# Altium PCB wulpus_pro_shield.PcbDoc (part 1 of 3)
Units mm, origin at the board's own origin, x right, y up, seen from the top; angles counter-clockwise.
Board outline 44.9 x 21 mm, 6 copper layers (Top Layer, Layer 2, Layer 3, Layer 4, Layer 5, Bottom Layer), stack 0.913 mm thick; 186 components, 134 nets, 731 pads, 283 vias.
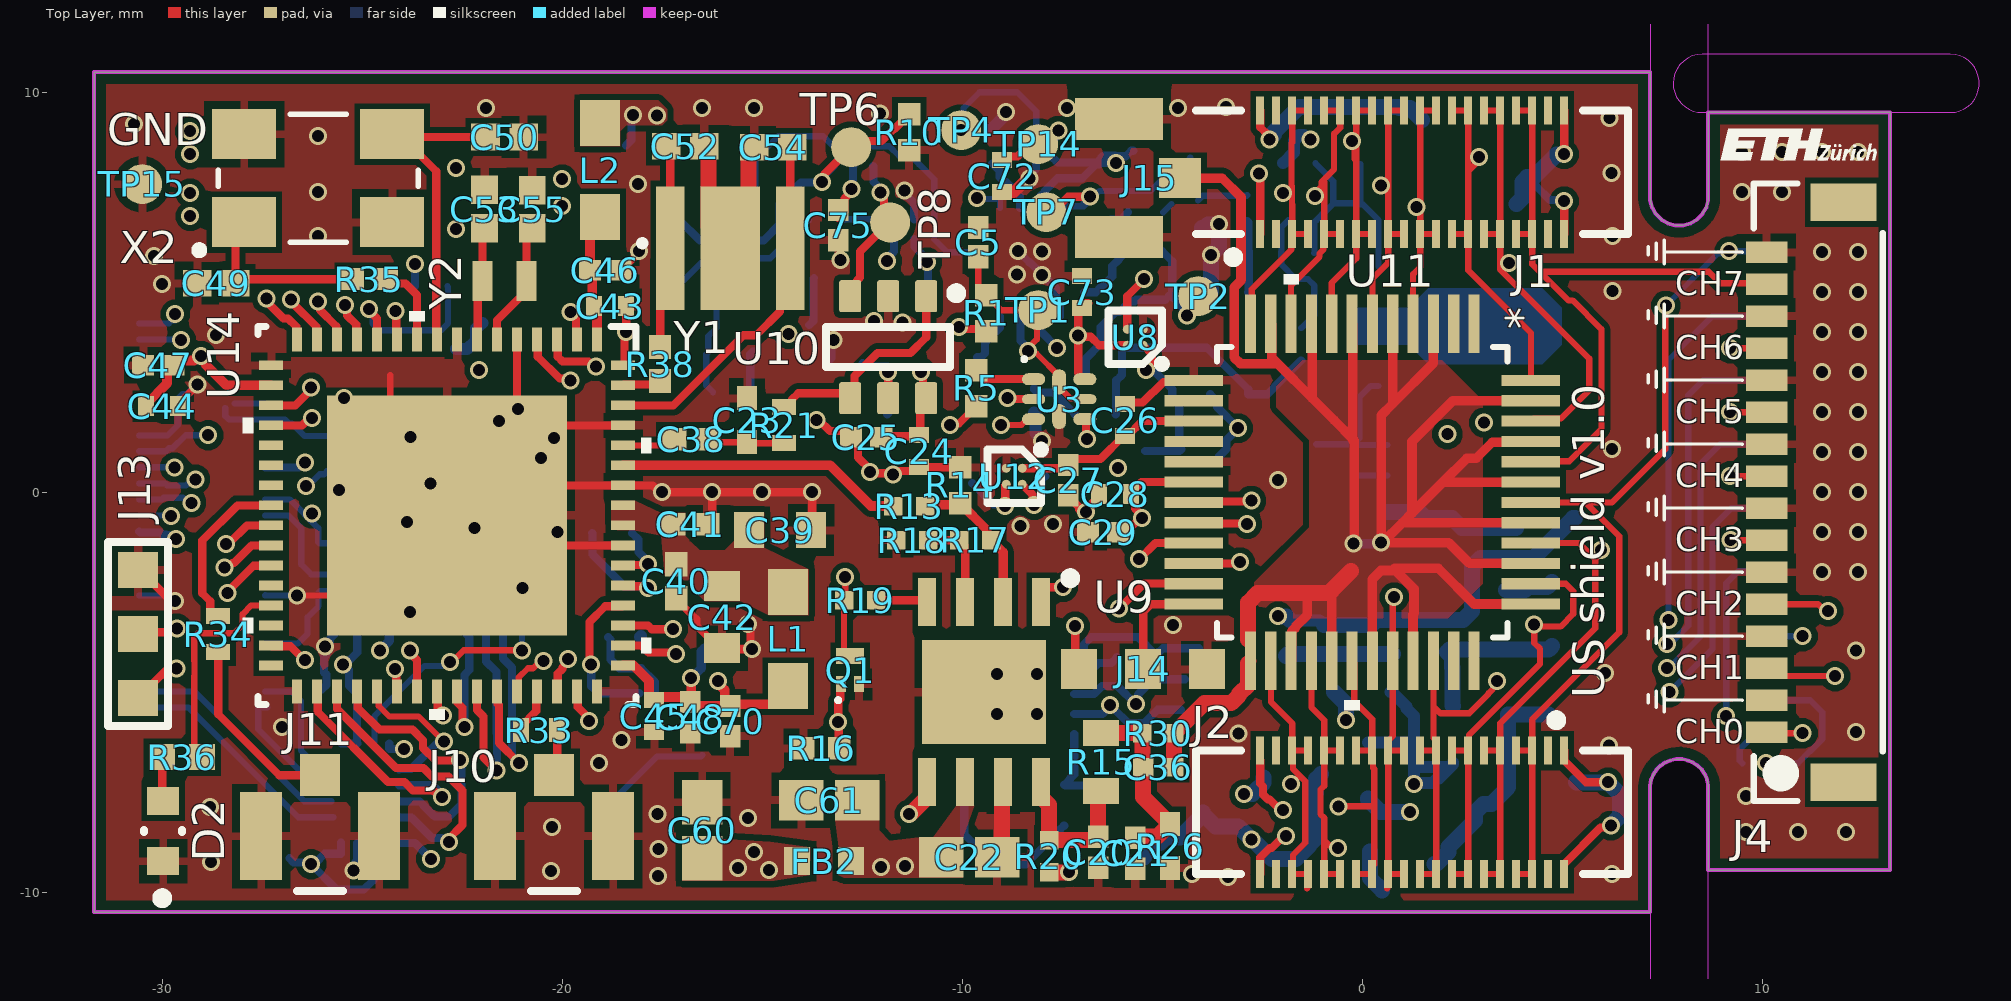
[diagram p0: Top Layer view]
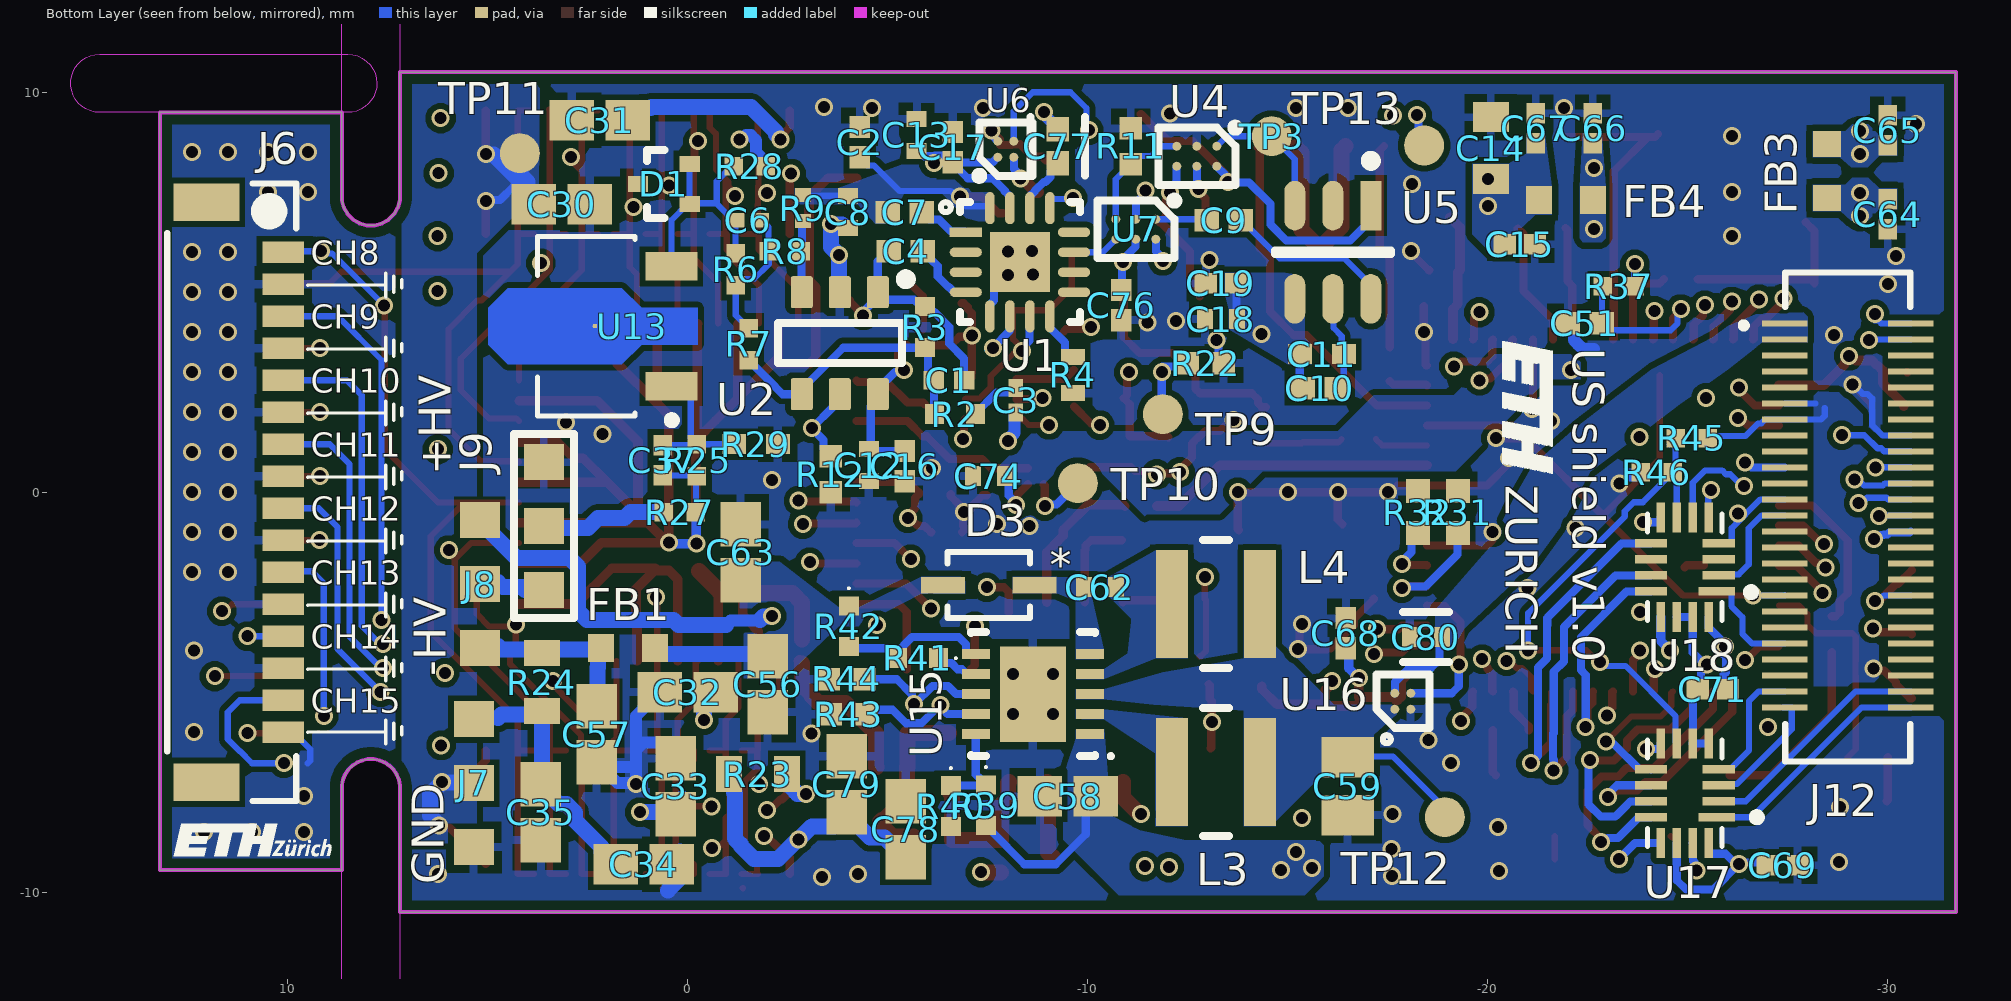
[diagram p1: Bottom Layer view, seen from below]
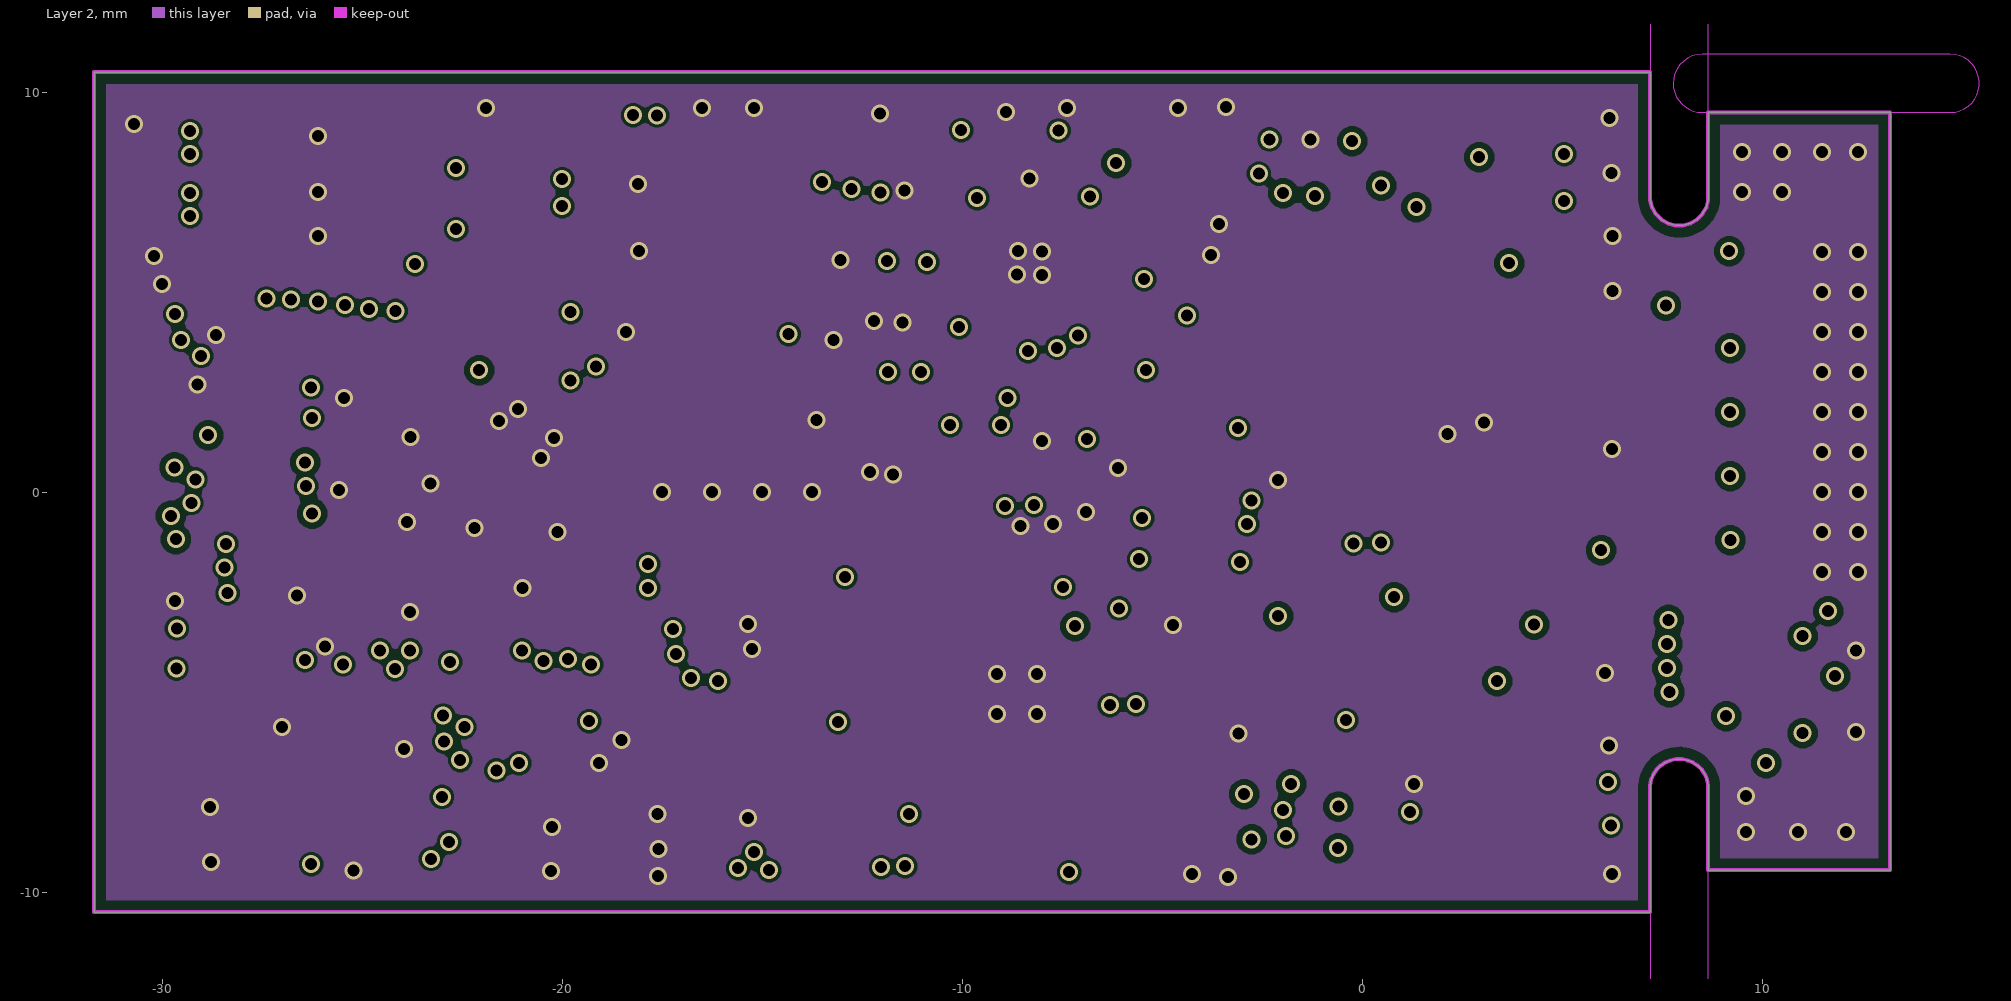
[diagram p2: Layer 2]
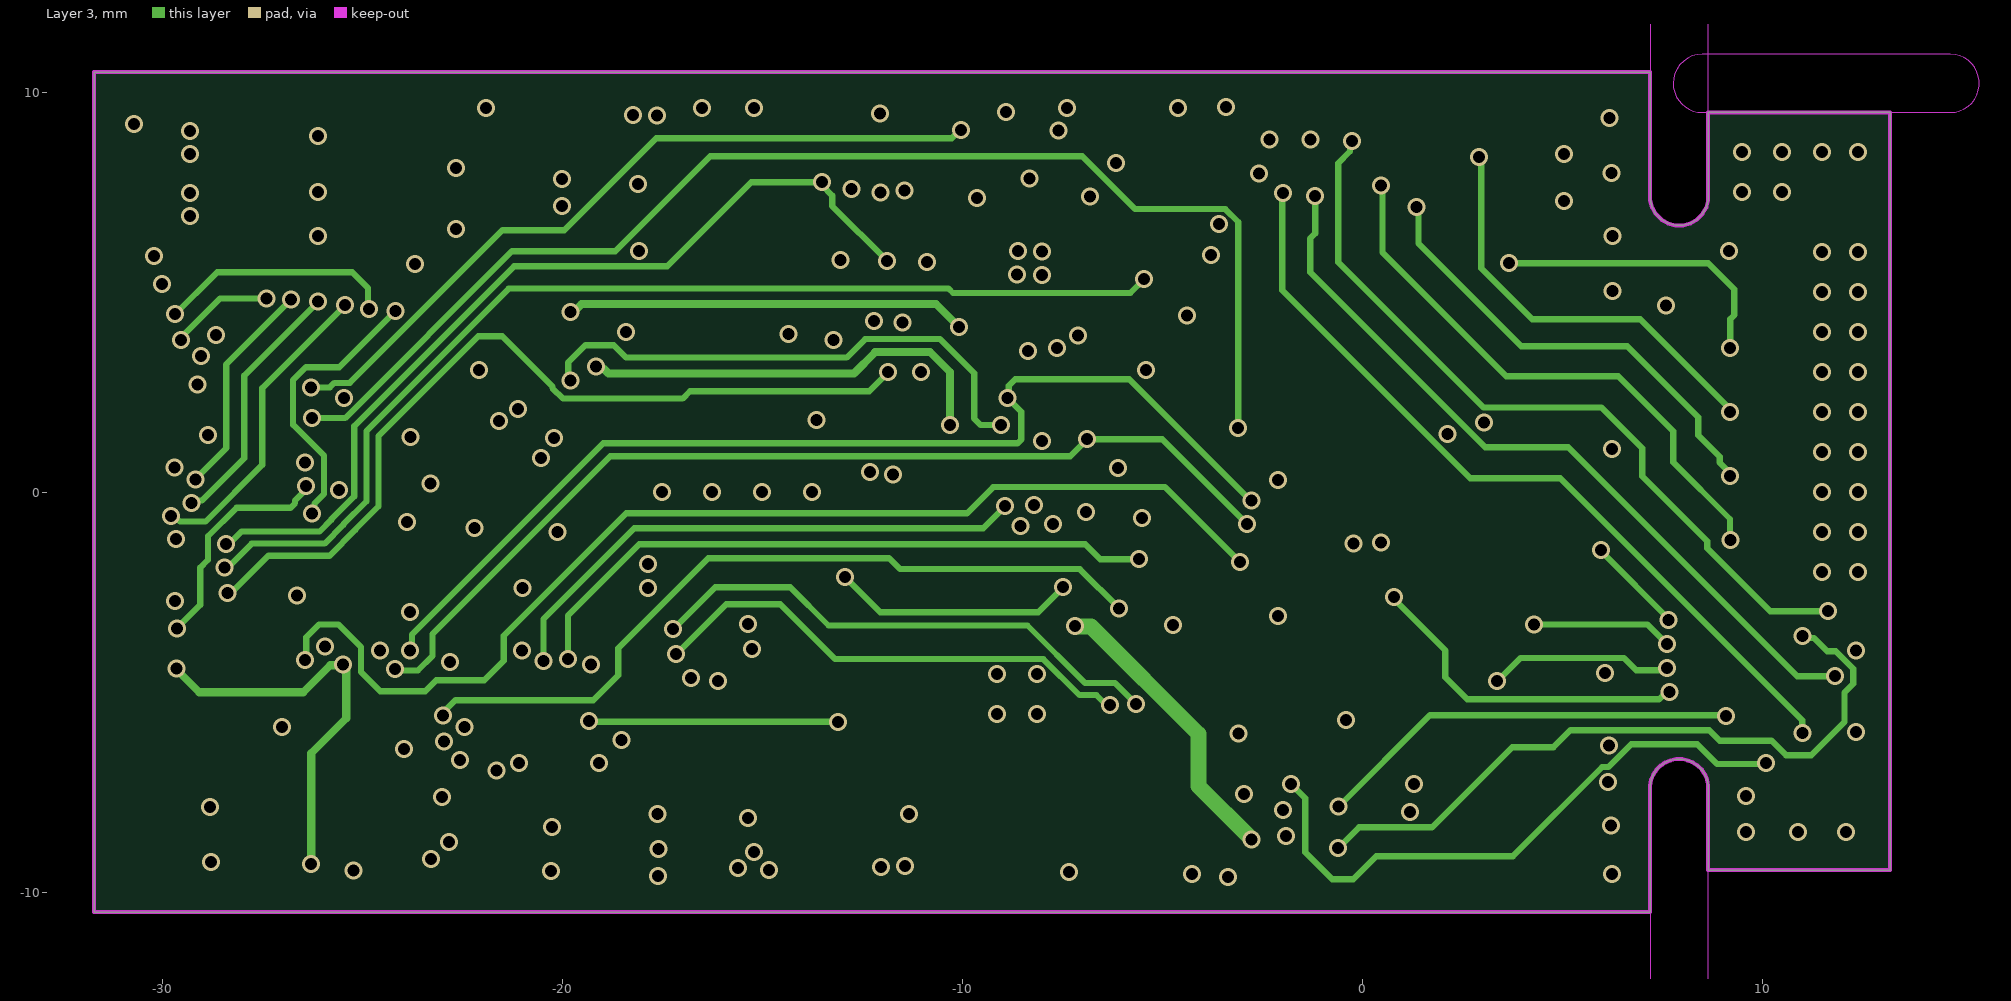
[diagram p3: Layer 3]
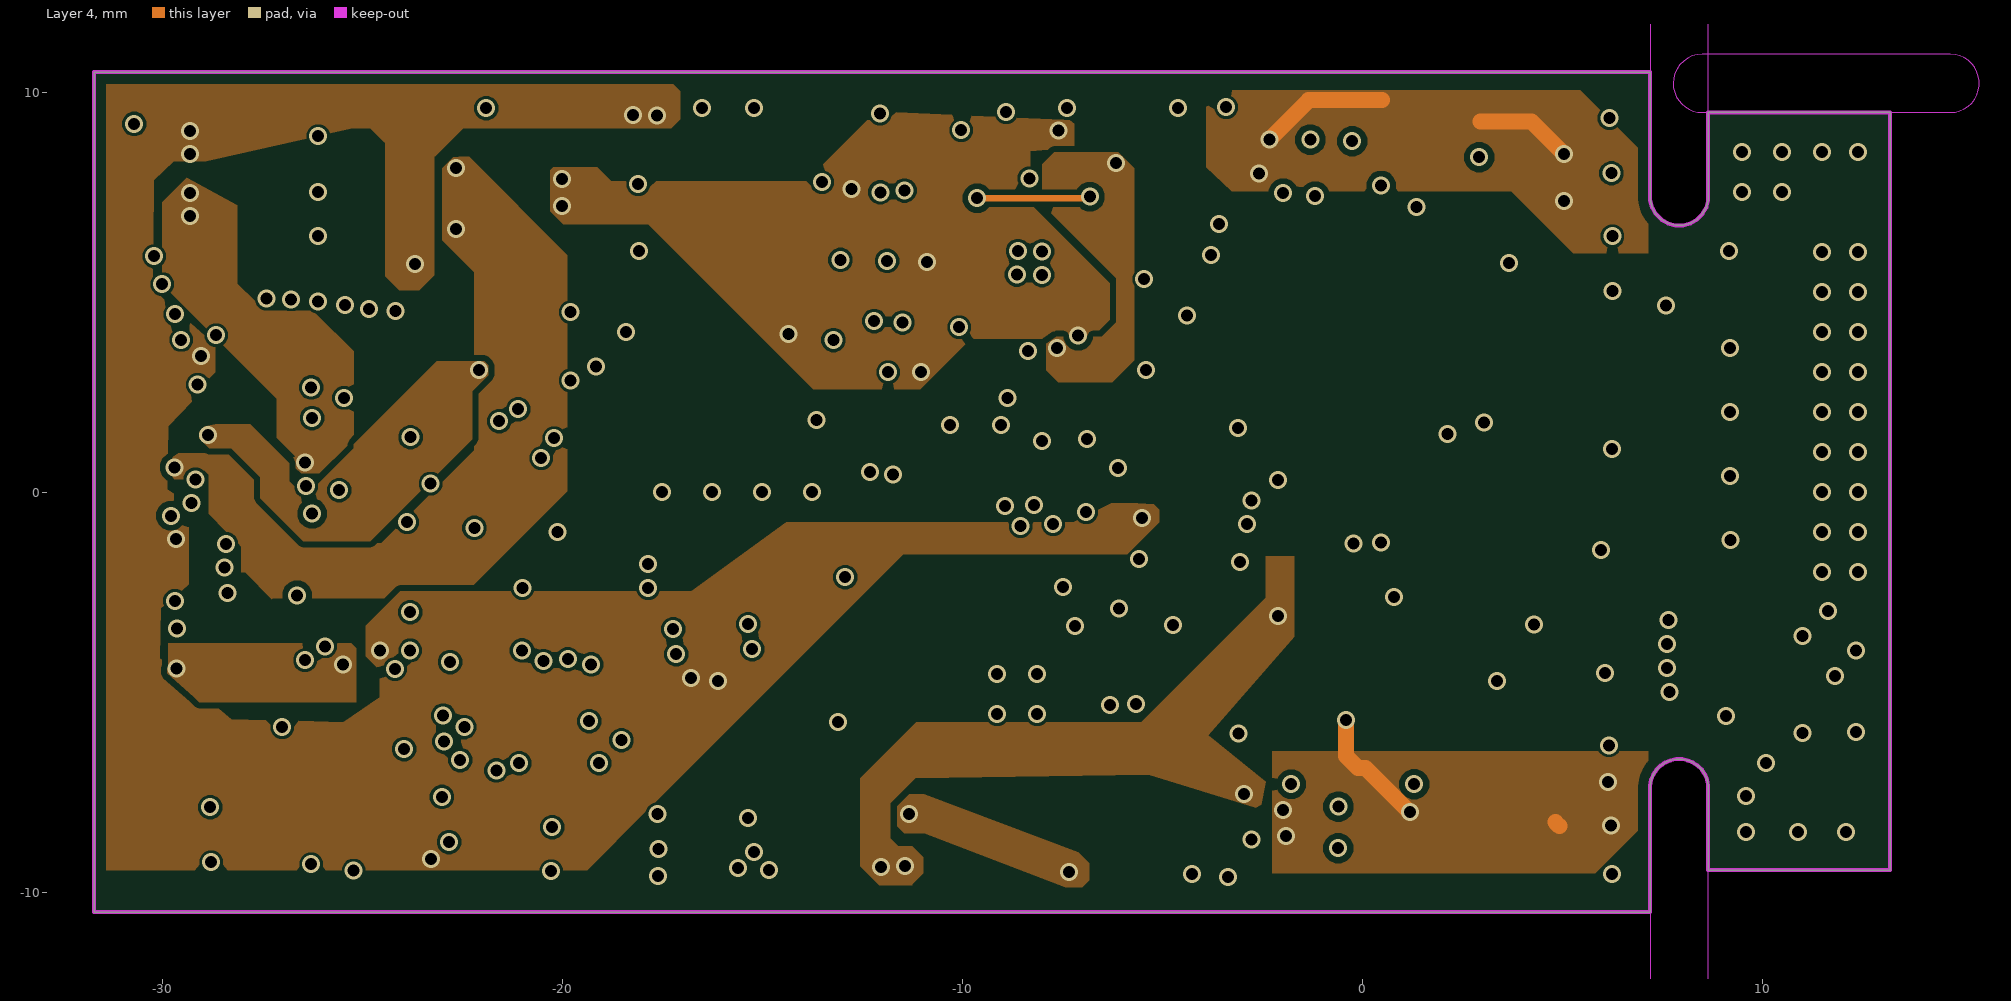
[diagram p4: Layer 4]
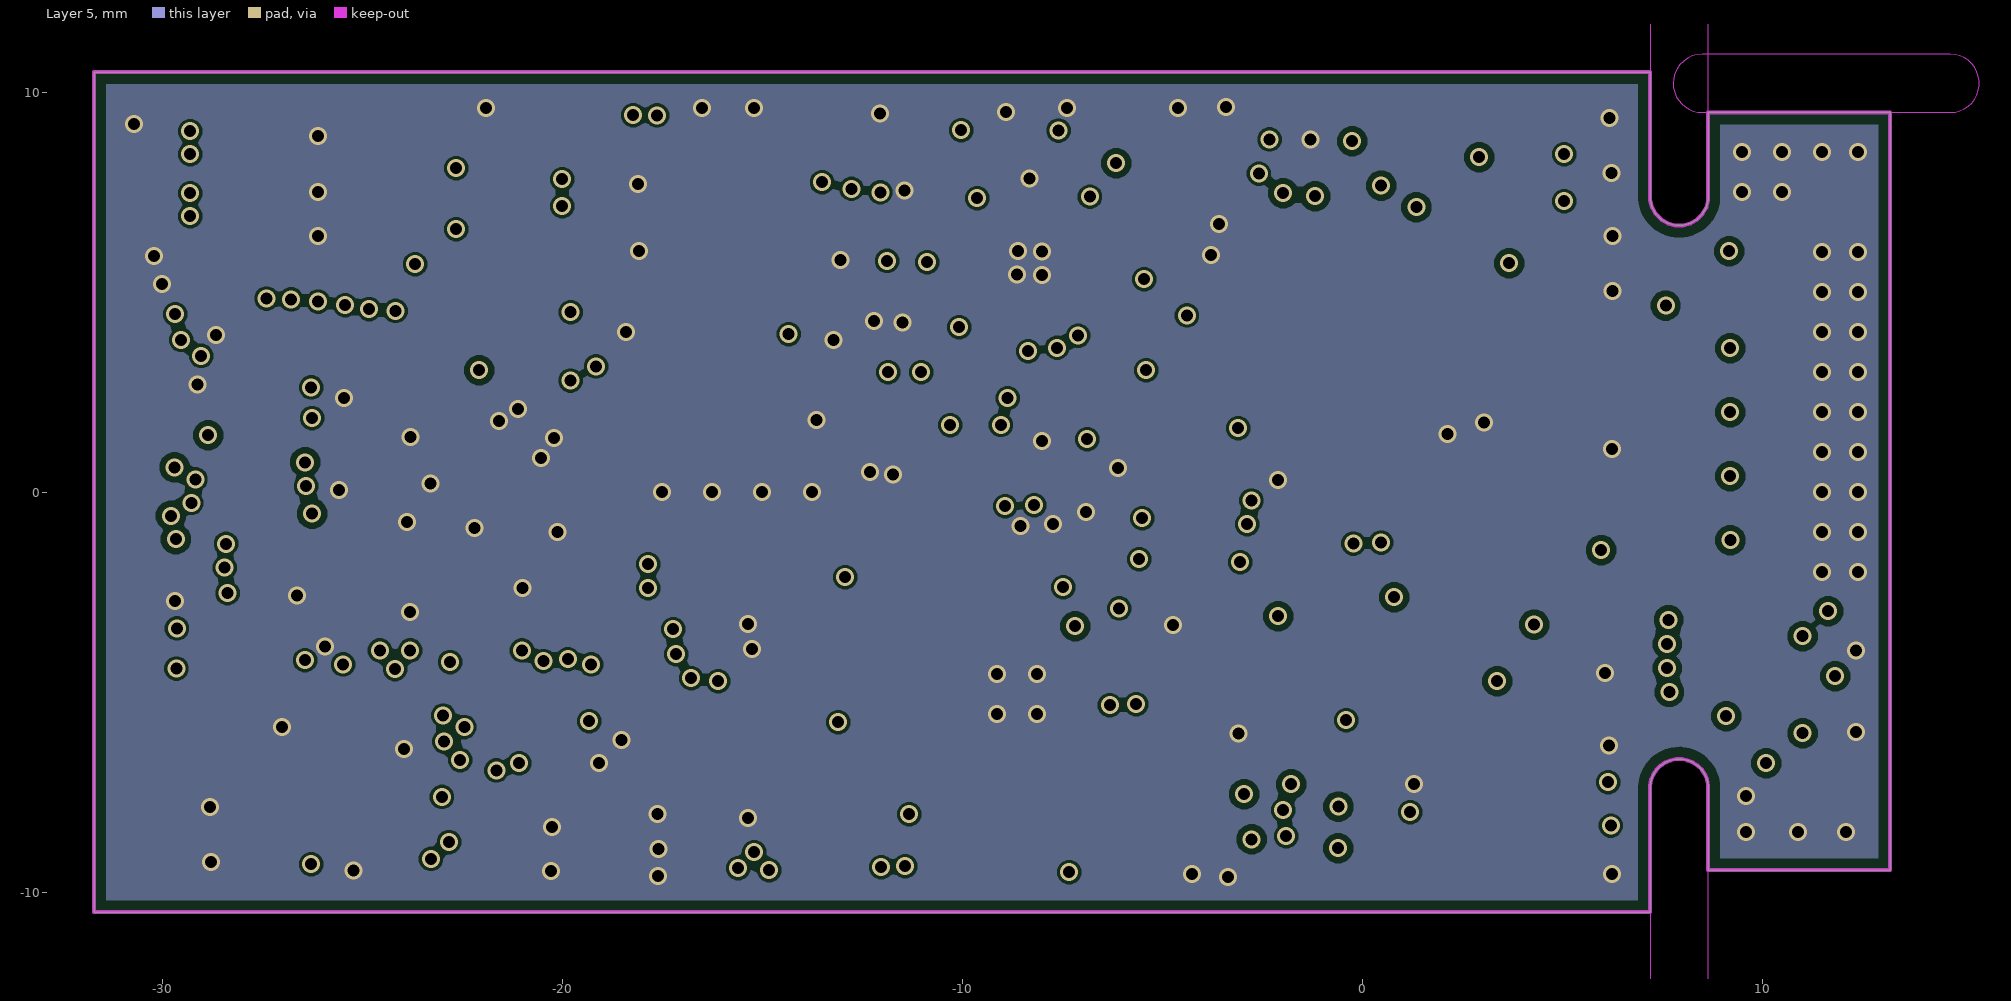
[diagram p5: Layer 5]
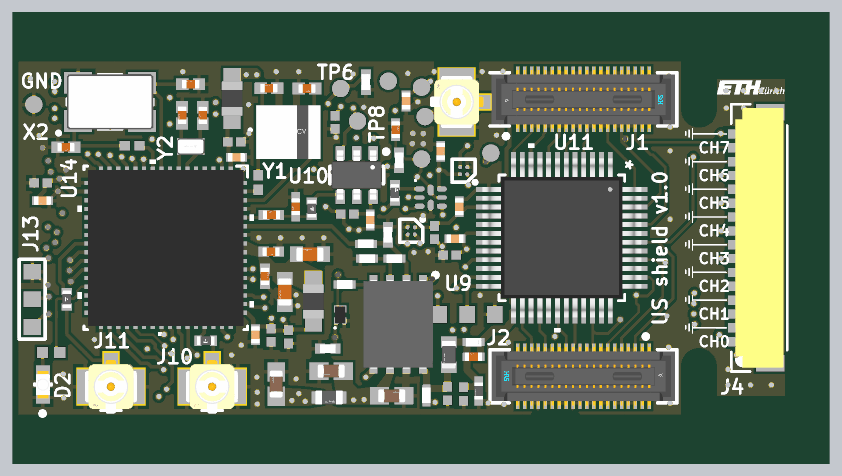
[diagram p8: 3D render of the assembled board from above, using the file's embedded part models]
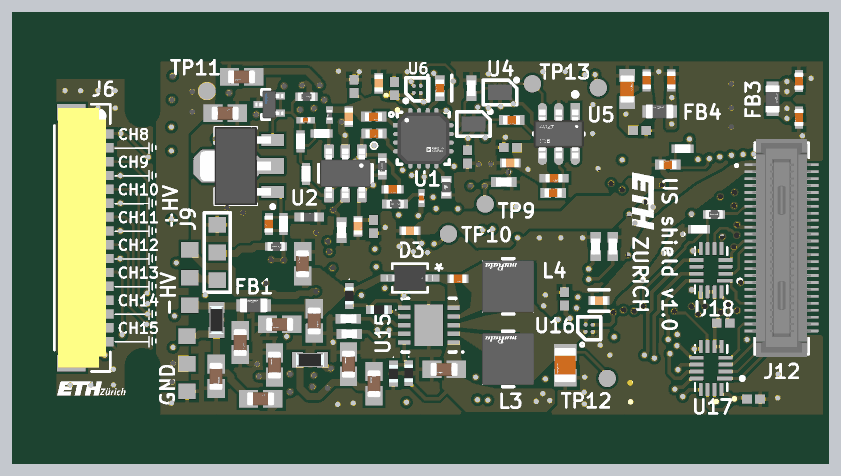
[diagram p9: 3D render of the assembled board from below, using the file's embedded part models]

## Layer stack, top to bottom
Top Solder: solder mask 0.0102, Solder Resist, Dk 3.5
Top Layer: signal copper 0.0175
Dielectric 3: prepreg 0.1195, PP-006, Dk 4.45
Layer 2: signal copper 0.035
Dielectric 5: core 0.13, Core-009, Dk 4.6
Layer 3: signal copper 0.035
Dielectric 1: prepreg 0.1195, PP-006, Dk 4.45
Dielectric 2: prepreg 0.1195, PP-006, Dk 4.45
Layer 4: signal copper 0.035
Dielectric 6: core 0.13, Core-009, Dk 4.6
Layer 5: signal copper 0.035
Dielectric 4: prepreg 0.1195, PP-006, Dk 4.45
Bottom Layer: signal copper 0.0175
Bottom Solder: solder mask 0.0102, Solder Resist, Dk 3.5

## Board outline
-31.7,-10.5 7.195,-10.5 7.195,-7.4 7.195,-7.328 7.223,-7.188 7.278,-7.055 7.358,-6.936 7.459,-6.835 7.578,-6.755 7.71,-6.7 7.851,-6.672 7.923,-6.672 7.924,-6.672 7.995,-6.672 8.135,-6.7 8.268,-6.755 8.387,-6.835 8.488,-6.936 8.567,-7.055 8.622,-7.188 8.65,-7.328 8.65,-7.4 8.65,-9.45 13.2,-9.45 13.2,9.495 8.65,9.495 8.65,7.4 8.65,7.304 8.6,7.119 8.505,6.953 8.369,6.818 8.203,6.722 8.018,6.673 7.827,6.673 7.642,6.722 7.476,6.818 7.341,6.953 7.245,7.119 7.195,7.304 7.195,7.4 7.195,10.5 -31.7,10.5
cut-out: 14.7,10.95 8.5,10.95 ccw(c8.5,10.223) 7.772,10.224 7.772,10.223 ccw(c8.5,10.223) 8.5,9.495 14.7,9.495 ccw(c14.7,10.223)
cut-out: 8.65,7.4 8.65,12.3 ccw(c7.923,12.3) 7.924,13.028 7.923,13.028 ccw(c7.923,12.3) 7.195,12.3 7.195,7.4 ccw(c7.923,7.4)
cut-out: 8.65,-12.3 8.65,-7.4 ccw(c7.923,-7.4) 7.924,-6.672 7.923,-6.672 ccw(c7.923,-7.4) 7.195,-7.4 7.195,-12.3 ccw(c7.923,-12.3)

## Design rules (kind name [scope] priority, off if disabled: settings)
BoardOutlineClearance [Not OnSilkscreen] p1: gap=0.3 ignorepadtopadclearanceinfootprint=FALSE except(0.2: Track-OutlineEdge Track-CavityEdge Track-CutoutEdge SMDPad-OutlineEdge SMDPad-CavityEdge SMDPad-CutoutEdge; 0.5: THPad-OutlineEdge THPad-CavityEdge THPad-CutoutEdge Via-OutlineEdge Via-CavityEdge Via-CutoutEdge)
Clearance [All] p1: gap=0.15 ignorepadtopadclearanceinfootprint=FALSE except(0.2: Arc-THPad Track-THPad)
ComponentClearance [All] p1: gap=0.1 collisioncheckmode=3 verticalgap=0.3 showdistances=TRUE
HoleToHoleClearance [All] p1: gap=0.254 allowstackedmicrovias=FALSE
MinimumSolderMaskSliver [All] p1: minsoldermaskwidth=0.1
PlaneConnect [All] p1: planeconnectstyle=Relief reliefexpansion=0.508 reliefentries=4 reliefconductorwidth=0.254 reliefairgap=0.2
PolygonConnect PolygonConnect_GND_via [InNet('GND') vs IsVia] p1: connectstyle=Direct reliefconductorwidth=0.254 reliefentries=4 polygonreliefangle="90 Angle" airgapwidth=0.254
PolygonConnect PolygonConnect_GND [InNet('GND')] p2: connectstyle=Relief reliefconductorwidth=0.2 reliefentries=4 polygonreliefangle="90 Angle" airgapwidth=0.2
PolygonConnect [All] p3: connectstyle=Direct reliefconductorwidth=0.254 reliefentries=4 polygonreliefangle="90 Angle" airgapwidth=0.254
RoutingVias [All] p1: holewidth=0.3 width=0.45 viastyle="Through Hole" minholewidth=0.3 minwidth=0.45 maxholewidth=0.3 maxwidth=0.45
SilkToSilkClearance [All] p1: silktosilkclearance=0.01
SilkToSolderMaskClearance [IsPad] p1: minsilkscreentomaskgap=0.01 clearancetoexposedcopper=TRUE
SolderMaskExpansion [IsVia] p1: expansion=0.102 istentingtop=TRUE
SolderMaskExpansion SolderMaskExpansion_1 [All] p2: expansion=0.025 istentingtop=FALSE
Width [All] p1: maxlimit=1.016 minlimit=0.152 preferedwidth=0.203
24 further rules are at their usual default settings.

## Classes and differential pairs
component class main: TP15
component class U_tx_path: C20 C21 C22 Q1 R13 R14 R15 R16 R17 R18 R19 R20 U9
component class U_rx_path: C1 C2 C3 C4 C5 C6 C7 C8 C9 C10 C11 C12 C13 C14 C15 C16 C17 C18 C19 C72 C73 C75 C76 C77 R1 R2 R3 R4 R5 R6 R7 R8 R9 R10 R11 R12 TP1 TP2 TP3 TP4 TP6 TP7 U1 U2 U3 U4 U5 U6 U7 U8
component class U_rx_path_lp_filter: C23 C24 C25 R21 R22 TP8 TP9 U10
component class U_power: C56 C57 C58 C59 C60 C61 C62 C63 C64 C65 C66 C67 C80 D3 FB1 FB2 FB3 FB4 L3 L4 R39 R40 R41 R42 R43 R44 TP12 TP13 TP14 U15 U16
component class U_msp430: 23 C38 C39 C40 C41 C42 C43 C44 C45 C46 C47 C48 C49 C50 C51 C52 C53 C54 C55 D2 J10 J11 L1 L2 R31 R32 R33 R34 R35 R36 R37 R38 U14 X2 Y1 Y2
component class U_hv_mux_tr_sw: 323 C26 C27 C28 C29 C30 C31 C32 C33 C34 C35 C36 C37 C74 C78 C79 D1 J1 J2 J4 J6 J7 J8 J9 J14 J15 R23 R24 R25 R26 R27 R28 R29 R30 TP10 TP11 U11 U12 U13
component class U_host_connector: C68 C69 C70 C71 J12 J13 R45 R46 U17 U18

## Components (designator, comment, footprint, x,y, rotation, side; value= is the part's Value field where it differs from the comment)
C1 "GJM1555C1H1R5BB01D" FP-GJM155-0_05-IPC_C -6.529,2.8 r180 bottom
C2 "C0402C104K4RACTU" CAPC1005X55X30LL05T10 -4.3,8.75 r270 bottom
C3 "GRM033R71A103KA01D" FP-GRM033-0_03-IPC_B -8.2,2.3 r90 bottom
C4 "GRM1555C1H102JA01D" FP-GRM155-0_05-IPC_B -5.45,6.025 r180 bottom
C5 "04025C332JAT2A" FP-0402-L_1_0_1-W_0_5_0_1-IPC_C -9.6,6.25 r90 top
C6 "GRM033R71A103KA01D" FP-GRM033-0_03-IPC_B -1.5,6.8 r180 bottom
C7 "GRM1555C1H102JA01D" FP-GRM155-0_05-IPC_B -5.425,7 r180 bottom
C8 "C1005X7S1A225K050BC" FP-C1005-050-0_15-0_1-MFG -4,7 r270 bottom
C9 "GRM1555C1H102JA01D" FP-GRM155-0_05-IPC_B -13.4,6.8 r180 bottom
C10 "GRM1555C1H102JA01D" FP-GRM155-0_05-IPC_B -15.8,2.6 r0 bottom
C11 "04025A101FAT2A" FP-0402-L_1_0_1-W_0_5_0_1-MFG -15.85,3.45 r180 bottom locked
C12 "C1005X7S1A225K050BC" FP-C1005-050-0_15-0_1-MFG -4.525,0.675 r270 bottom
C13 "C1005X7S1A225K050BC" FP-C1005-050-0_15-0_1-MFG -5.724,8.936 r90 bottom
C14 "GRM188R60J476ME01D" FP-GRM188-0_2-MFG -20.075,8.6 r90 bottom locked
C15 "C0402C104K4RACTU" CAPC1005X55X30LL05T10 -20.8,6.2 r0 bottom locked
C16 "C0402C104K4RACTU" CAPC1005X55X30LL05T10 -5.425,0.65 r90 bottom
C17 "C0402C104K4RACTU" CAPC1005X55X30LL05T10 -6.625,8.625 r270 bottom
C18 "C1005X7S1A225K050BC" FP-C1005-050-0_15-0_1-MFG -13.325,4.325 r0 bottom locked
C19 "C0402C104K4RACTU" CAPC1005X55X30LL05T10 -13.325,5.225 r180 bottom
C20 "GRM1555C1H100JA01D" CAPC1005X55X25LL05T10 -6.6,-9 r90 top
C21 "GRM1555C1H100JA01D" CAPC1005X55X25LL05T10 -5.675,-9.025 r90 top
C22 "GRM188R61H225ME11D" FP-GRM188-0_2-IPC_B -9.825,-9.125 r0 top
C23 "04025A101FAT2A" FP-0402-L_1_0_1-W_0_5_0_1-MFG -15.375,1.8 r270 top locked
C24 "C1005X7S1A225K050BC" FP-C1005-050-0_15-0_1-MFG -11.075,1.025 r270 top locked
C25 "C0402C104K4RACTU" CAPC1005X55X30LL05T10 -12.4,1.375 r0 top locked
C26 "C1005X7S1A225K050BC" FP-C1005-050-0_15-0_1-MFG -5.925,1.8 r90 top
C27 "C0402C104K4RACTU" CAPC1005X55X30LL05T10 -7.35,0.3 r90 top
C28 "C1005X7S1A225K050BC" FP-C1005-050-0_15-0_1-MFG -6.175,-0.05 r180 top
C29 "C0402C104K4RACTU" CAPC1005X55X30LL05T10 -6.475,-1 r0 top
C30 "GRM188R61H225ME11" FP-GRM188-0_2-IPC_B 3.15,7.2 r180 bottom
C31 "GRM188R61H225ME11" FP-GRM188-0_2-IPC_B 2.2,9.3 r0 bottom
C32 "GRM188R61H225ME11" FP-GRM188-0_2-IPC_B 0,-5 r0 bottom
C33 "GRM188R61H225ME11" FP-GRM188-0_2-IPC_B 0.3,-7.35 r90 bottom
C34 "GRM188R61H225ME11" FP-GRM188-0_2-IPC_B 1.1,-9.3 r180 bottom
C35 "GRM188R61H225ME11" FP-GRM188-0_2-IPC_B 3.675,-8 r270 bottom
C36 "GRM155R71H473ME14D" FP-GRM155-0_05-IPC_C -5.1,-6.875 r180 top
C37 "GRM155R71H473ME14D" FP-GRM155-0_05-IPC_C 0.625,0.8 r270 bottom
C38 "GRM1555C1H102JA01D" FP-GRM155-0_05-IPC_B -16.775,1.325 r180 top locked
C39 "GRM188R60J476ME01D" FP-GRM188-0_2-MFG -14.55,-0.95 r180 top locked
C40 "GRM1555C1H102JA01D" FP-GRM155-0_05-IPC_B -17.15,-2.225 r90 top locked
C41 "GRM1555C1H102JA01D" FP-GRM155-0_05-IPC_B -16.8,-0.8 r0 top locked
C42 "GRM188R60J476ME01D" FP-GRM188-0_2-MFG -16,-3.125 r270 top locked
C43 "C1005X7S1A225K050BC" FP-C1005-050-0_15-0_1-MFG -18.8,4.65 r180 top locked
C44 "C1005X7S1A225K050BC" FP-C1005-050-0_15-0_1-MFG -30,2.15 r180 top
C45 "C1005X7S1A225K050BC" FP-C1005-050-0_15-0_1-MFG -17.7,-5.6 r90 top locked
C46 "C0402C104K4RACTU" CAPC1005X55X30LL05T10 -18.925,5.55 r0 top locked
C47 "C0402C104K4RACTU" CAPC1005X55X30LL05T10 -30.1,3.175 r180 top
C48 "C0402C104K4RACTU" CAPC1005X55X30LL05T10 -16.8,-5.625 r270 top locked
C49 "GJM1555C1H120GB01D" FP-GJM155-0_05-IPC_A -28.65,5.225 r0 top locked
C50 "GJM1555C1H120GB01D" FP-GJM155-0_05-IPC_A -21.44,8.88 r180 top locked
C51 "GRM1555C1H102JA01D" FP-GRM155-0_05-IPC_B -22.425,4.225 r0 bottom locked
C52 "GJM1555C1H120GB01D" FP-GJM155-0_05-IPC_A -16.925,8.65 r180 top locked
C53 "GJM1555C1H120GB01D" FP-GJM155-0_05-IPC_A -21.94,7.08 r270 top locked
C54 "GJM1555C1H120GB01D" FP-GJM155-0_05-IPC_A -14.725,8.625 r0 top locked
C55 "GJM1555C1H120GB01D" FP-GJM155-0_05-IPC_A -20.75,7.075 r270 top locked
C56 "GRM188R61H225ME11D" FP-GRM188-0_2-IPC_B -2,-4.8 r270 bottom
C57 "GRM188R61H225ME11D" FP-GRM188-0_2-IPC_B 2.275,-6.05 r270 bottom
C58 "GRM188R61H225ME11D" FP-GRM188-0_2-IPC_B -9.5,-7.6 r0 bottom
C59 "GCM21BR71H105KA03L" FP-GCM21B-0_15-IPC_C -16.5,-7.35 r270 bottom
C60 "GRM188R61H225ME11D" FP-GRM188-0_2-IPC_B -16.5,-8.45 r90 top locked
C61 "GRM188R61H225ME11D" FP-GRM188-0_2-IPC_B -13.325,-7.7 r180 top locked
C62 "GRM155C71H104KE19D" FP-GRM155-0_05-MFG -10.3,-2.373 r180 bottom
C63 "GRM188R61H225ME11D" FP-GRM188-0_2-IPC_B -1.325,-1.5 r90 bottom
C64 "GRM155Z71A105KE01D" FP-GRM155-0_1-IPC_C -30,6.95 r270 bottom locked
C65 "GRM155Z71A105KE01D" FP-GRM155-0_1-IPC_C -30,9.05 r90 bottom locked
C66 "GRM155Z71A105KE01D" FP-GRM155-0_1-IPC_C -22.625,9.1 r90 bottom locked
C67 "GRM155Z71A105KE01D" FP-GRM155-0_1-IPC_C -21.2,9.1 r90 bottom locked
C68 "C0402C104K4RACTU" CAPC1005X55X30LL05T10 -16.45,-3.525 r90 bottom locked
C69 "C0402C104K4RACTU" CAPC1005X55X30LL05T10 -27.375,-9.325 r180 bottom
C70 "C0402C104K4RACTU" CAPC1005X55X30LL05T10 -15.8,-5.725 r270 top locked
C71 "C0402C104K4RACTU" CAPC1005X55X30LL05T10 -25.625,-4.925 r180 bottom locked
C72 "C1005X7S1A225K050BC" FP-C1005-050-0_15-0_1-MFG -9,7.9 r90 top
C73 "C1005X7S1A225K050BC" FP-C1005-050-0_15-0_1-MFG -7,5 r270 top
C74 "C1005X7S1A225K050BC" FP-C1005-050-0_15-0_1-MFG -7.525,0.4 r180 bottom
C75 "C0402C104K4RACTU" CAPC1005X55X30LL05T10 -13.1,6.675 r90 top
C76 "C0402C104K4RACTU" CAPC1005X55X30LL05T10 -10.839,4.675 r90 bottom
C77 "GRM1555C1H102JA01D" FP-GRM155-0_05-IPC_B -9.25,8.65 r270 bottom
C78 "GRM188R61H225ME11" FP-GRM188-0_2-IPC_B -5.45,-8.425 r90 bottom
C79 "GRM188R61H225ME11" FP-GRM188-0_2-IPC_B -3.975,-7.3 r90 bottom
C80 "C1005X7S1A225K050BC" FP-C1005-050-0_15-0_1-MFG -18.45,-3.625 r180 bottom
D1 "BAV99T-7-F" FP-SOT523-MFG 0.6,7.7 r0 bottom value=1.5pF
D2 "APHD1608LZGCK" FP-APHD1608LZGCK-MFG -29.975,-8.475 r90 top locked
D3 "ZHCS400QTA" DIODE_SOD323_DIO -7.525,-2.323 r0 bottom
FB1 "BLM18SP101SN1D" FP-BLM18-0_15-t0_8-MFG 1.5,-3.9 r0 bottom
FB2 "BLM18SP101SN1D" FP-BLM18-0_15-t0_8-MFG -13.45,-9.225 r0 top locked
FB3 "BLM18SP101SH1D" FP-BLM18-0_15-t0_8-MFG -28.475,8.025 r90 bottom locked
FB4 "BLM18SP101SH1D" FP-BLM18-0_15-t0_8-MFG -21.95,7.3 r0 bottom locked
J1 "DF40C-40DS-0.4V(51)" FP-DF40C-40DS-0_4V_51-MFG 1.25,8 r0 top
J2 "DF40C-40DS-0.4V(51)" FP-DF40C-40DS-0_4V_51-MFG 1.25,-8 r180 top
J4 "DF52-16S-0.8H(21)" CONN_DF52-16S-0.8H(21)_HIR 11.4,0 r90 top
J6 "DF52-16S-0.8H(21)" CONN_DF52-16S-0.8H(21)_HIR 11.4,0 r270 bottom
J7 "Solder Jumper" "Jumper 3 pins" 5.35,-7.275 r270 bottom
J8 "Solder Jumper" "Jumper 3 pins" 5.2,-2.3 r270 bottom
J9 "Solder Jumper" "Jumper 3 pins" 3.6,-0.85 r270 bottom
J10 "U.FL-R-SMT-1(10)" FP-U_FL-R-SMT-1_10-MFG -20.2,-8.6 r0 top locked
J11 "U.FL-R-SMT-1(10)" FP-U_FL-R-SMT-1_10-MFG -26.05,-8.6 r0 top locked
J12 "DF40HC(3.0)-50DS-0.4V(51)" DF40HC3050DS04V51 -29,-0.58 r270 bottom locked
J13 "Solder Jumper" "Jumper 3 pins" -30.6,-3.55 r270 top locked
J14 "Solder Jumper" "Jumper 3 pins" -5.475,-4.425 r0 top
J15 "U.FL-R-SMT-1(10)" FP-U_FL-R-SMT-1_10-MFG -6.075,7.85 r270 top
L1 "742792040" SMD-0805 -14.35,-3.675 r90 top locked
L2 "742792040" SMD-0805 -19.05,8.05 r270 top locked
L3 "LQH3NPZ100MMEL" FP-LQH3NPH_ME-MFG -13.2,-7 r0 bottom locked
L4 "LQH3NPZ100MMEL" FP-LQH3NPH_ME-MFG -13.2,-2.8 r0 bottom locked
Q1 "NX7002BKMBYL" NX7002BKMBYL -12.8,-4.45 r90 top locked
R1 "CRCW04021K30JNED" FP-CRCW0402-e3-IPC_B -9.4,4.475 r90 top
R2 "ERJ-2RKF2001X" FP-ERJ2RK-MFG -6.675,1.95 r0 bottom
R3 "ERJ-2RKF2001X" FP-ERJ2RK-MFG -5.925,4.125 r90 bottom
R4 "CRCW04021R00FKEDC" FP-CRCW0402-C-e3-MFG -9.625,2.925 r90 bottom
R5 "MCS04020C2701FE000" FP-MCS0402-IPC_B -9.65,2.6 r90 top
R6 "CRCW04020000Z0ED" FP-CRCW0402-e3-IPC_C -1.2,5.575 r270 bottom
R7 "CRCW04020000Z0ED" FP-CRCW0402-e3-IPC_C -1.525,3.7 r270 bottom
R8 "CRCW04020000Z0ED" FP-CRCW0402-e3-IPC_C -2.425,6.025 r180 bottom
R9 "RMCF0201JT47K0" FP-RMCF0201-MFG -2.875,7.1 r270 bottom
R10 "CRCW040210K0JNED" FP-CRCW0402-e3-IPC_B -11.325,9 r270 top
R11 "CRCW040210K0JNED" FP-CRCW0402-e3-IPC_B -11.075,8.65 r90 bottom locked
R12 "CRCW040210K0JNED" FP-CRCW0402-e3-IPC_B -3.575,0.45 r270 bottom
R13 "CRCW040251R0JNED" FP-CRCW0402-e3-IPC_C -11.325,-0.35 r0 top locked
R14 "CRCW040210K0JNED" FP-CRCW0402-e3-IPC_B -10.05,0.175 r270 top
R15 "ERJ-3GEY0R00V" FP-ERJ-3GEY0R00V-MFG -6.525,-6.75 r90 top value=0Ω
R16 "CRCW040210K0JNED" FP-CRCW0402-e3-IPC_B -13.525,-6.4 r0 top locked
R17 "CRCW04020000Z0ED" FP-CRCW0402-e3-IPC_C -9.675,-1.2 r180 top
R18 "CRCW04020000Z0ED" FP-CRCW0402-e3-IPC_C -11.25,-1.2 r0 top
R19 "CRCW04020000Z0ED" FP-CRCW0402-e3-IPC_C -12.55,-2.7 r0 top locked
R20 "CRCW04020000Z0ED" FP-CRCW0402-e3-IPC_C -7.825,-9.1 r270 top
R21 "CRCW0402402RFKEDC" FP-CRCW0402-C-e3-MFG -14.45,1.675 r270 top locked
R22 "CRCW040210K0JNED" FP-CRCW0402-e3-IPC_B -12.95,3.225 r180 bottom locked
R23 "ERJ-PA3J302V" ERJP03_PA3_(0603) -1.75,-7.05 r0 bottom
R24 "ERJ-PA3J302V" ERJP03_PA3_(0603) 3.65,-4.75 r270 bottom
R25 "CRCW04020000Z0ED" FP-CRCW0402-e3-IPC_C -0.225,0.8 r270 bottom
R26 "RC1005F394CS" FP-RC1005-MFG -4.8,-8.85 r270 top
R27 "ERJ-2RKF1003X" FP-ERJ2RK-IPC_C 0.2,-0.5 r0 bottom
R28 "ERJ-2RKF1003X" FP-ERJ2RK-IPC_C -1.55,8.15 r0 bottom
R29 "RC1005F394CS" FP-RC1005-MFG -1.7,1.2 r0 bottom
R30 "CRCW04020000Z0ED" FP-CRCW0402-e3-IPC_C -5.1,-6.025 r180 top
R31 "CRCW04021M00FKED" FP-CRCW0402-e3-MFG -19.25,-0.5 r90 bottom locked
R32 "CRCW04021M00FKED" FP-CRCW0402-e3-MFG -18.25,-0.5 r90 bottom locked
R33 "RC0402JR-0722RL" FP-CRCW0402-C-e3-MFG -20.575,-5.95 r180 top locked
R34 "CRCW0402402RFKEDC" FP-CRCW0402-C-e3-MFG -28.6,-3.55 r90 top locked
R35 "RC0402JR-0722RL" RESC1005X40X25NL05T10 -24.825,5.325 r0 top locked
R36 "CPF0402B324RE1" RESC1005X35X20ML05T10 -29.5,-6.625 r180 top locked
R37 "CRCW040247K0FKED" FP-CRCW0402-e3-IPC_C -23.275,5.15 r0 bottom locked
R38 "RC0402JR-0722RL" RESC1005X40X25NL05T10 -17.55,3.2 r270 top locked
R39 "ERJ-2RKF1004X" ERJ2RKD1004X#1 -7.45,-7.825 r270 bottom
R40 "ERJ-2RKF4322X" ERJ2RKD1004X#2 -6.575,-7.85 r270 bottom
R41 "ERJ-2RKF4122X" ERJ2RKD1004X#1 -5.75,-4.15 r0 bottom
R42 "ERJ-2RKF1004X" ERJ2RKD1004X#1 -4.026,-3.35 r270 bottom
R43 "CRCW040210K0JNED" FP-CRCW0402-e3-IPC_B -4.025,-5.55 r0 bottom
R44 "CRCW040210K0JNED" FP-CRCW0402-e3-IPC_B -3.975,-4.675 r0 bottom
R45 "ERJ-2RKF1003X" FP-ERJ2RK-IPC_C -25.1,1.35 r180 bottom locked
R46 "CRCW04020000Z0ED" FP-CRCW0402-e3-IPC_C -24.225,0.5 r180 bottom locked
TP1 "TP-SM-C-100" TP-SM-C-100 -8.1,4.55 r0 top
TP2 "TP-SM-C-100" TP-SM-C-100 -4.1,4.9 r90 top
TP3 "TP-SM-C-100" TP-SM-C-100 -14.6,8.9 r90 bottom
TP4 "TP-SM-C-100" TP-SM-C-100 -10.025,9.05 r90 top locked
TP6 "TP-SM-C-100" TP-SM-C-100 -12.777,8.625 r90 top locked
TP7 "TP-SM-C-100" TP-SM-C-100 -7.9,7 r90 top
TP8 "TP-SM-C-100" TP-SM-C-100 -11.8,6.744 r90 top
TP9 "TP-SM-C-100" TP-SM-C-100 -11.875,1.95 r90 bottom locked
TP10 "TP-SM-C-100" TP-SM-C-100 -9.75,0.225 r90 bottom
TP11 "TP-SM-C-100" TP-SM-C-100 4.2,8.475 r90 bottom
TP12 "TP-SM-C-100" TP-SM-C-100 -18.925,-8.123 r90 bottom
TP13 "TP-SM-C-100" TP-SM-C-100 -18.408,8.669 r90 bottom locked
TP14 "TP-SM-C-100" TP-SM-C-100 -8.1,8.7 r90 top
TP15 "TP-SM-C-100" TP-SM-C-100 -30.5,7.7 r90 top
U1 "AD8338ACPZ-R7" FP-CP-16-22-IPC_C -8.303,5.75 r180 bottom
U2 "OPA836IDBVT" DBV0006A_L -3.8,3.725 r270 bottom
U3 "TPL0501-100RSER" TI-RSE8_V -7.575,2.325 r270 top
U4 "TS5A3159AYZPR" BGA6C50P2X3_89X139X50 -12.725,8.4 r270 bottom locked
U5 "LTC5507ES6#TRMPBF" FP-LTC5507ES6#TRMPBF-IPC_B -16.125,6 r270 bottom locked
U6 "TPS22916CYFPR" BGA4C40P2X2_78X78X50 -7.95,8.575 r90 bottom
U7 "TS5A3159AYZPR" BGA6C50P2X3_89X139X50 -11.2,6.575 r270 bottom
U8 "TPS22916CYFPR" BGA4C40P2X2_78X78X50 -5.675,3.875 r180 top
U9 "IXDD604D2TR" SON95P500X400X100-9N -9.45,-5 r270 top
U10 "OPA836IDBVT" DBV0006A_L -11.85,3.625 r270 top
U11 "HV2707T-C/R8X" LQFP48_7X7MC_MCH 0,0 r270 top
U12 "TPS22916CYFPR" BGA4C40P2X2_78X78X50 -8.7,0.4 r270 top
U13 "MD0100" AMP_PHA-1+ 2.541,4.15 r90 bottom
U14 "MSP430FR5043IRGCT" RGC0064G -22.88,-0.58 r270 top locked
U15 "LT3463EDD#PBF" LT-DD-10_V -8.625,-5.048 r0 bottom
U16 "TPS22916CYFPR" BGA4C40P2X2_78X78X50 -17.875,-5.225 r90 bottom locked
U17 "SN74AVC4T774RSVR" QFN40P260X180X55-16N -24.925,-7.525 r0 bottom locked
U18 "SN74AVC4T774RSVR" QFN40P260X180X55-16N -24.925,-1.875 r0 bottom locked
X2 "FY0800018" XTAL_ECS-80-18-30B-AGN-TR -26.1,7.85 r0 top locked
Y1 "AWSCR-8.00CV-T" AWSCR-8.00CV-T_ABR -15.8,6.1 r0 top locked
Y2 "ABS05-32.768KHZ-9-T" FP-ABS05-MFG -21.44,5.28 r180 top locked

## Footprints (in the part's own frame and the unit in brackets; to place one, negate y for a bottom-side part, rotate by r counter-clockwise, add the part's x,y. Pads: shape width x height; smd on the part's side, far side on the other; paste and mask are expansions set on the pad)
AMP_PHA-1+ [mil]
  rect 28x51.18 smd: 1(-59,-84) 3(59,-84)
  round 1 smd: 2(0,-6.75)
  rect 3.94x3.94 smd paste-39.37 mask+0: 2_4(0,-8.5)
  Top Layer region: 37.5,77 37.5,-35 18,-54.5 18,-110 -18,-110 -18,-54.5 -37.5,-35 -37.5,77 -18,96.5 18,96.5
  silkscreen extent -96,-88 88,48, body extent -89,-81 89,81, height 63
AWSCR-8.00CV-T_ABR [mil]
  rect 28x122 smd paste+0 mask+0: 1(-59.06,0) 3(59.06,0)
  rect 59x122 smd paste+0 mask+0: 2(0,0)
  silkscreen extent -90,2 -84,8, body extent -73,-61 73,61, height 48
BGA4C40P2X2_78X78X50 [mm]
  round 0.226 smd: A1(-0.2,0.2) A2(0.2,0.2) B1(-0.2,-0.2) B2(0.2,-0.2)
  silkscreen extent -0.76,-0.66 0.66,0.76
BGA6C50P2X3_89X139X50 [mm]
  round 0.226 smd: A1(-0.25,0.5) A2(0.25,0.5) B1(-0.25,0) B2(0.25,0) C1(-0.25,-0.5) C2(0.25,-0.5)
  silkscreen extent -0.81,-0.96 0.71,1.06, body extent -0.44,-0.69 0.44,0.69, height 0.5
CAPC1005X55X25LL05T10 [mm] "Chip Capacitor, 2-Leads, Body 1.00x0.50mm, IPC High Density"
  rect 0.56x0.52 smd: 1(-0.39,0) 2(0.39,0)
  body extent -0.53,-0.28 0.53,0.28, height 0.55
CAPC1005X55X30LL05T10 [mm] "Chip Capacitor, 2-Leads, Body 1.00x0.50mm, IPC High Density"
  rect 0.56x0.52 smd: 1(-0.38,0) 2(0.38,0)
  body extent -0.53,-0.28 0.53,0.28, height 0.55
CONN_DF52-16S-0.8H(21)_HIR [mil]
  rect 21x41 smd paste+0 mask+0: 1(-236.22,50.63) 2(-204.72,50.63) 3(-173.23,50.63) 4(-141.73,50.63) 5(-110.24,50.63) 6(-78.74,50.63) 7(-47.24,50.63) 8(-15.75,50.63) 9(15.75,50.63) 10(47.24,50.63) 11(78.74,50.63) 12(110.24,50.63) 13(141.73,50.63) 14(173.23,50.63) 15(204.72,50.63) 16(236.22,50.63)
  rect 37x65 smd: 17(-285.43,-24.96) 18(285.43,-24.96)
  silkscreen extent -304,-64 304,64, body extent -295,-55 295,54, height 69
DBV0006A_L [mm]
  rrect18% 0.8x0.55 smd: 1(-1.275,0.95) 2(-1.275,0) 3(-1.275,-0.95) 4(1.275,-0.95) 5(1.275,0) 6(1.275,0.95)
  silkscreen extent -1.72,-1.55 0.5,1.77, body extent -1.42,-1.46 1.42,1.46, height 1.11
DF40HC3050DS04V51 [mil]
  rect 6x44.56 smd paste+0 mask+0: 1(-188.98,-62) 2(-173.23,-62) 3(-157.48,-62) 4(-141.73,-62) 5(-125.98,-62) 6(-110.24,-62) 7(-94.49,-62) 8(-78.74,-62) 9(-62.99,-62) 10(-47.24,-62) 11(-31.5,-62) 12(-15.75,-62) 13(0,-62) 14(15.75,-62) 15(31.5,-62) 16(47.24,-62) 17(62.99,-62) 18(78.74,-62) 19(94.49,-62) 20(110.24,-62) 21(125.98,-62) 22(141.73,-62) 23(157.48,-62) 24(173.23,-62) 25(188.98,-62) 26(188.98,62) 27(173.23,62) 28(157.48,62) 29(141.73,62) 30(125.98,62) 31(110.24,62) 32(94.49,62) 33(78.74,62) 34(62.99,62) 35(47.24,62) 36(31.5,62) 37(15.75,62) 38(0,62) 39(-15.75,62) 40(-31.5,62) 41(-47.24,62) 42(-62.99,62) 43(-78.74,62) 44(-94.49,62) 45(-110.24,62) 46(-125.98,62) 47(-141.73,62) 48(-157.48,62) 49(-173.23,62) 50(-188.98,62)
  silkscreen extent -239,-104 242,61, body extent -248,-67 248,67, height 114
DIODE_SOD323_DIO [mil]
  rect 43.56x16.36 smd paste+0 mask+0: 1(-45,0) 2(45,0)
  silkscreen extent -40,-32 40,32, body extent -53,-27 53,27, height 47
ERJ2RKD1004X#1 [mm]
  rect 0.475x0.5 smd: 1(-0.512,0) 2(0.512,0)
  silkscreen extent -0.97,-0.03 -0.93,0.03, body extent -0.5,-0.25 0.5,0.25, height 0.35
ERJ2RKD1004X#2 [mm]
  rect 0.475x0.5 smd: 1(-0.515,0) 2(0.512,0)
  silkscreen extent -0.97,-0.03 -0.93,0.03, body extent -0.5,-0.25 0.5,0.25, height 0.35
ERJP03_PA3_(0603) [mm]
  rect 0.65x0.9 smd: 1(-0.725,0) 2(0.725,0)
  body extent -0.8,-0.4 0.8,0.4, height 0.45
FP-0402-L_1_0_1-W_0_5_0_1-IPC_C [mm]
  rect 0.581x0.512 smd paste+0 mask+0: 1(-0.366,0) 2(0.366,0)
  body extent -0.5,-0.25 0.5,0.25, height 0.56
FP-0402-L_1_0_1-W_0_5_0_1-MFG [mm]
  rect 0.6x0.5 smd paste+0 mask+0: 1(-0.55,0) 2(0.55,0)
  body extent -0.5,-0.25 0.5,0.25, height 0.56
FP-ABS05-MFG [mm]
  rect 0.5x1 smd paste+0 mask+0: 1(-0.55,0) 2(0.55,0)
  body extent -0.95,-0.65 0.95,0.65, height 0.25
FP-APHD1608LZGCK-MFG [mm]
  rect 0.7x0.8 smd paste+0 mask+0: 1(-0.75,0) 2(0.75,0)
  silkscreen extent -1.8,-0.48 0.03,0.48, body extent -1.2,-0.58 1.2,0.58, height 0.25
FP-BLM18-0_15-t0_8-MFG [mm]
  rect 0.65x0.7 smd paste+0 mask+0: 1(-0.675,0) 2(0.675,0)
  body extent -0.8,-0.4 0.8,0.4, height 0.95
FP-C1005-050-0_15-0_1-MFG [mm]
  rect 0.4x0.5 smd paste+0 mask+0: 1(-0.4,0) 2(0.4,0)
  body extent -0.5,-0.25 0.5,0.25, height 0.65
FP-CP-16-22-IPC_C [mm]
  rect 0.806x0.239 smd paste+0 mask+0: 1(-1.353,0.75)
  rrect100% 0.806x0.239 smd paste+0 mask+0: 2(-1.353,0.25) 3(-1.353,-0.25) 4(-1.353,-0.75) 9(1.353,-0.75) 10(1.353,-0.25) 11(1.353,0.25) 12(1.353,0.75)
  rrect100% 0.239x0.806 smd paste+0 mask+0: 5(-0.75,-1.353) 6(-0.25,-1.353) 7(0.25,-1.353) 8(0.75,-1.353) 13(0.75,1.353) 14(0.25,1.353) 15(-0.25,1.353) 16(-0.75,1.353)
  rect 1.5x1.5 smd paste-1000 mask+0: 17(0,0)
  silkscreen extent -1.98,-1.5 1.5,1.5, body extent -1.5,-1.5 1.5,1.5, height 0.8
FP-CRCW0402-C-e3-MFG [mm]
  rect 0.4x0.6 smd paste+0 mask+0: 1(-0.45,0) 2(0.45,0)
  body extent -0.5,-0.25 0.5,0.25, height 0.35
FP-CRCW0402-e3-IPC_B [mm]
  rect 0.568x0.572 smd paste+0 mask+0: 1(-0.452,0) 2(0.452,0)
  body extent -0.5,-0.25 0.5,0.25, height 0.4
FP-CRCW0402-e3-IPC_C [mm]
  rect 0.468x0.472 smd paste+0 mask+0: 1(-0.402,0) 2(0.402,0)
  body extent -0.5,-0.25 0.5,0.25, height 0.4
FP-CRCW0402-e3-MFG [mm]
  rect 0.6x0.6 smd paste+0 mask+0: 1(-0.525,0) 2(0.525,0)
  body extent -0.5,-0.25 0.5,0.25, height 0.4
FP-DF40C-40DS-0_4V_51-MFG [mm]
  rect 0.2x0.7 smd paste-1000 mask+0: 1(-3.8,-1.54) 2(-3.8,1.54) 3(-3.4,-1.54) 4(-3.4,1.54) 5(-3,-1.54) 6(-3,1.54) 7(-2.6,-1.54) 8(-2.6,1.54) 9(-2.2,-1.54) 10(-2.2,1.54) 11(-1.8,-1.54) 12(-1.8,1.54) 13(-1.4,-1.54) 14(-1.4,1.54) 15(-1,-1.54) 16(-1,1.54) 17(-0.6,-1.54) 18(-0.6,1.54) 19(-0.2,-1.54) 20(-0.2,1.54) 21(0.2,-1.54) 22(0.2,1.54) 23(0.6,-1.54) 24(0.6,1.54) 25(1,-1.54) 26(1,1.54) 27(1.4,-1.54) 28(1.4,1.54) 29(1.8,-1.54) 30(1.8,1.54) 31(2.2,-1.54) 32(2.2,1.54) 33(2.6,-1.54) 34(2.6,1.54) 35(3,-1.54) 36(3,1.54) 37(3.4,-1.54) 38(3.4,1.54) 39(3.8,-1.54) 40(3.8,1.54)
  silkscreen extent -5.4,-2.25 5.4,1.54, body extent -5.5,-1.99 5.5,1.99, height 0.25
FP-ERJ2RK-IPC_C [mm]
  rect 0.468x0.472 smd paste+0 mask+0: 1(-0.402,0) 2(0.402,0)
  body extent -0.5,-0.25 0.5,0.25, height 0.4
FP-ERJ2RK-MFG [mm]
  rect 0.475x0.5 smd paste+0 mask+0: 1(-0.513,0) 2(0.513,0)
  body extent -0.5,-0.25 0.5,0.25, height 0.4
FP-ERJ-3GEY0R00V-MFG [mm]
  rect 0.65x0.9 smd paste+0 mask+0: 1(-0.725,0) 2(0.725,0)
  body extent -1.15,-0.58 1.15,0.58, height 0.25
FP-GCM21B-0_15-IPC_C [mm]
  rect 1.006x1.308 smd paste+0 mask+0: 1(-0.726,0) 2(0.726,0)
  body extent -1,-0.63 1,0.63, height 1.4
FP-GJM155-0_05-IPC_A [mm]
  rect 0.715x0.672 smd paste+0 mask+0: 1(-0.479,0) 2(0.479,0)
  body extent -1.04,-0.54 1.04,0.54, height 0.25
FP-GJM155-0_05-IPC_C [mm]
  rect 0.515x0.472 smd paste+0 mask+0: 1(-0.379,0) 2(0.379,0)
  body extent -0.5,-0.25 0.5,0.25, height 0.55
FP-GRM033-0_03-IPC_B [mm]
  rect 0.454x0.363 smd paste+0 mask+0: 1(-0.304,0) 2(0.304,0)
  body extent -0.3,-0.15 0.3,0.15, height 0.33
FP-GRM155-0_1-IPC_C [mm]
  rect 0.515x0.472 smd paste+0 mask+0: 1(-0.379,0) 2(0.379,0)
  body extent -0.5,-0.25 0.5,0.25, height 0.6
FP-GRM155-0_05-IPC_B [mm]
  rect 0.615x0.572 smd paste+0 mask+0: 1(-0.429,0) 2(0.429,0)
  body extent -0.5,-0.25 0.5,0.25, height 0.55
FP-GRM155-0_05-IPC_C [mm]
  rect 0.515x0.472 smd paste+0 mask+0: 1(-0.379,0) 2(0.379,0)
  body extent -0.74,-0.38 0.74,0.38, height 0.25
FP-GRM155-0_05-MFG [mm]
  rect 0.4x0.5 smd paste+0 mask+0: 1(-0.4,0) 2(0.4,0)
  body extent -0.5,-0.25 0.5,0.25, height 0.55
FP-GRM188-0_2-IPC_B [mm]
  rect 1.105x1.006 smd paste+0 mask+0: 1(-0.701,0) 2(0.701,0)
  body extent -1.5,-0.75 1.5,0.75, height 0.25
FP-GRM188-0_2-MFG [mm]
  rect 0.75x0.9 smd paste+0 mask+0: 1(-0.775,0) 2(0.775,0)
  body extent -0.8,-0.4 0.8,0.4, height 1
FP-LQH3NPH_ME-MFG [mm]
  rect 0.8x2.7 smd paste+0 mask+0: 1(-1.1,0) 2(1.1,0)
  silkscreen extent -0.33,-1.6 0.33,1.6, body extent -1.5,-1.5 1.5,1.5, height 1.5
FP-LTC5507ES6#TRMPBF-IPC_B [mm]
  rect 1.24x0.526 smd paste+0 mask+0: 1(-1.165,0.95)
  rrect100% 1.24x0.526 smd paste+0 mask+0: 2(-1.165,0) 3(-1.165,-0.95) 4(1.166,-0.95) 5(1.166,0) 6(1.166,0.95)
  silkscreen extent -2.41,-1.45 0.05,1.45, body extent -1.41,-1.45 1.41,1.45, height 1
FP-MCS0402-IPC_B [mm]
  rect 0.565x0.572 smd paste+0 mask+0: 1(-0.454,0) 2(0.454,0)
  body extent -0.5,-0.25 0.5,0.25, height 0.37
FP-RC1005-MFG [mm]
  rect 0.6x0.5 smd paste+0 mask+0: 1(-0.55,0) 2(0.55,0)
  body extent -0.95,-0.38 0.95,0.38, height 0.25
FP-RMCF0201-MFG [mm]
  rect 0.35x0.4 smd paste+0 mask+0: 1(-0.325,0) 2(0.325,0)
  body extent -0.3,-0.15 0.3,0.15, height 0.26
FP-SOT523-MFG [mm]
  rect 0.51x0.4 smd paste+0 mask+0: 1(-0.645,0.5) 2(-0.645,-0.5) 3(0.645,0)
  silkscreen extent -0.02,-0.85 0.43,0.85, body extent -0.81,-0.8 0.81,0.8, height 0.9
FP-U_FL-R-SMT-1_10-MFG [mm]
  rect 1x1.05 smd paste-1000 mask+0: 1(0,1.525)
  rect 1.05x2.2 smd paste-1000 mask+0: 2(-1.475,0) 3(1.475,0)
  silkscreen extent -0.58,-1.38 0.58,-1.38, body extent -1.5,-1.55 1.5,1.55, height 1.45
"Jumper 3 pins" [mm] "Jumper 3 pins 0603x2"
  rect 0.9x1 smd: 1(-1.6,0) 2(0,0) 3(1.6,0)
  body extent -1.65,-0.47 1.65,0.47, height 0.6
LQFP48_7X7MC_MCH [mil]
  rect 57.56x11 smd paste+0 mask+0: 1(-166,110) 2(-166,90) 3(-166,70) 4(-166,50) 5(-166,30) 6(-166,10) 7(-166,-10) 8(-166,-30) 9(-166,-50) 10(-166,-70) 11(-166,-90) 12(-166,-110) 25(166,-110) 26(166,-90) 27(166,-70) 28(166,-50) 29(166,-30) 30(166,-10) 31(166,10) 32(166,30) 33(166,50) 34(166,70) 35(166,90) 36(166,110)
  rect 11x57.56 smd paste+0 mask+0: 13(-110,-166) 14(-90,-166) 15(-70,-166) 16(-50,-166) 17(-30,-166) 18(-10,-166) 19(10,-166) 20(30,-166) 21(50,-166) 22(70,-166) 23(90,-166) 24(110,-166) 37(110,166) 38(90,166) 39(70,166) 40(50,166) 41(30,166) 42(10,166) 43(-10,166) 44(-30,166) 45(-50,166) 46(-70,166) 47(-90,166) 48(-110,166)
  silkscreen extent -215,-143 215,143, body extent -181,-181 181,181, height 63
LT-DD-10_V [mm] "SON, 10-Leads, Body 3x3mm, Pitch 0.5mm, Thermal Pad 2.38x1.65mm"
  rect 0.7x0.25 smd: 1(-1.425,1) 2(-1.425,0.5) 3(-1.425,0) 4(-1.425,-0.5) 5(-1.425,-1) 6(1.425,-1) 7(1.425,-0.5) 8(1.425,0) 9(1.425,0.5) 10(1.425,1)
  rect 1.65x2.38 smd: 11(0,0)
  silkscreen extent -2,-1.55 1.55,1.6, body extent -1.5,-1.5 1.5,1.5, height 0.8
NX7002BKMBYL [mm]
  rect 0.4x0.25 smd: 1(-0.35,0.225) 2(-0.35,-0.225)
  rect 0.4x0.7 smd: 3(0.35,0)
  silkscreen extent -0.8,0.25 -0.7,0.35, body extent -0.5,-0.3 0.5,0.3, height 0.37
QFN40P260X180X55-16N [mm]
  rrect6% 0.91x0.22 smd: 1(-0.795,0.6)
  rrect6% 0.81x0.22 smd: 2(-0.845,0.2) 3(-0.845,-0.2) 4(-0.845,-0.6) 9(0.845,-0.6) 10(0.845,-0.2) 11(0.845,0.2) 12(0.845,0.6)
  rrect6% 0.22x0.75 smd: 5(-0.6,-1.245) 6(-0.2,-1.245) 7(0.2,-1.245) 8(0.6,-1.245) 13(0.6,1.245) 14(0.2,1.245) 15(-0.2,1.245) 16(-0.6,1.245)
  silkscreen extent -1.9,-1.33 0.93,1.33
RESC1005X35X20ML05T10 [mm] "Chip Resistor, 2-Leads, Body 1.00x0.50mm, IPC Low Density"
  rect 0.65x0.65 smd: 1(-0.5,0) 2(0.5,0)
  body extent -0.53,-0.27 0.53,0.28, height 0.35
RESC1005X40X25NL05T10 [mm] "Chip Resistor, 2-Leads, Body 1.00x0.50mm, IPC Medium Density"
  rect 0.6x0.55 smd: 1(-0.425,0) 2(0.425,0)
  body extent -0.53,-0.27 0.53,0.28, height 0.4
RGC0064G [mm]
  rect 0.6x0.24 smd paste+0 mask+0: 1(-4.4,3.75) 2(-4.4,3.25) 3(-4.4,2.75) 4(-4.4,2.25) 5(-4.4,1.75) 6(-4.4,1.25) 7(-4.4,0.75) 8(-4.4,0.25) 9(-4.4,-0.25) 10(-4.4,-0.75) 11(-4.4,-1.25) 12(-4.4,-1.75) 13(-4.4,-2.25) 14(-4.4,-2.75) 15(-4.4,-3.25) 16(-4.4,-3.75) 33(4.4,-3.75) 34(4.4,-3.25) 35(4.4,-2.75) 36(4.4,-2.25) 37(4.4,-1.75) 38(4.4,-1.25) 39(4.4,-0.75) 40(4.4,-0.25) 41(4.4,0.25) 42(4.4,0.75) 43(4.4,1.25) 44(4.4,1.75) 45(4.4,2.25) 46(4.4,2.75) 47(4.4,3.25) 48(4.4,3.75)
  rect 0.24x0.6 smd paste+0 mask+0: 17(-3.751,-4.4) 18(-3.251,-4.4) 19(-2.751,-4.4) 20(-2.251,-4.4) 21(-1.75,-4.4) 22(-1.25,-4.4) 23(-0.75,-4.4) 24(-0.25,-4.4) 25(0.25,-4.4) 26(0.75,-4.4) 27(1.25,-4.4) 28(1.75,-4.4) 29(2.251,-4.4) 30(2.751,-4.4) 31(3.251,-4.4) 32(3.751,-4.4) 49(3.751,4.4) 50(3.251,4.4) 51(2.751,4.4) 52(2.251,4.4) 53(1.75,4.4) 54(1.25,4.4) 55(0.75,4.4) 56(0.25,4.4) 57(-0.25,4.4) 58(-0.75,4.4) 59(-1.25,4.4) 60(-1.75,4.4) 61(-2.251,4.4) 62(-2.751,4.4) 63(-3.251,4.4) 64(-3.751,4.4)
  rect 6x6 smd paste-3 mask+0: 65(0,0)
  silkscreen extent -5.1,-5.1 5.1,5.1, body extent -4.5,-4.5 4.5,4.5, height 1
SMD-0805 [mm] "Chip Inductor, 2-Leads, Body 2.0x1.2mm"
  rect 1.15x1 smd: 1(-1.175,0) 2(1.175,0)
  body extent -1,-0.6 1,0.6, height 0.89
SON95P500X400X100-9N [mm]
  rect 1.2x0.45 smd: 1(-2.25,1.425) 2(-2.25,0.475) 3(-2.25,-0.475) 4(-2.25,-1.425) 5(2.25,-1.425) 6(2.25,-0.475) 7(2.25,0.475) 8(2.25,1.425)
  rect 2.6x3.1 smd: 9(0,0)
  silkscreen extent -2.97,2.03 -2.73,2.28, body extent -2.55,-2 2.55,2, height 1
TI-RSE8_V [mm] "QFN, 8-Leads, Body 1.5x1.5mm, Pitch 0.5mm"
  oval 0.3x0.58 smd: 1(-0.5,-0.64) 3(0.5,-0.64) 5(0.5,0.64) 7(-0.5,0.64)
  oval 0.25x0.58 smd: 2(0,-0.64) 6(0,0.64)
  oval 0.63x0.35 smd: 4(0.435,0) 8(-0.435,0)
  silkscreen extent -1.05,-0.92 -0.95,-0.82, body extent -0.75,-0.75 0.75,0.75, height 0.6
TP-SM-C-100 [mm]
  round 1 smd: 1(0,0)
XTAL_ECS-80-18-30B-AGN-TR [mm]
  rect 1.6x1.25 smd: 1(-1.85,-1.1) 2(1.85,-1.1) 3(1.85,1.1) 4(-1.85,1.1)
  silkscreen extent -3.07,-1.9 2.5,1.6, body extent -2.5,-1.6 2.5,1.6, height 0.86

## Part data
C1: library part CMP-2008-03820-2, Capacitance=1.5pF, Case Code (Imperial)=0402, Case Code (Metric)=1005, Dielectric=C0G, Max Operating Temperature=125°C, Min Operating Temperature=-55°C, Package Quantity=10000, Temperature Coefficient=30ppm/°C, Voltage=50V, Case/Package=0402, Construction=Flat, Depth=0.5mm, Height=0.5mm, Lead Free="Lead Free", Lead Pitch=0.3mm, Length=1mm, Mount="Surface Mount", Number of Pins=2, Packaging="Tape and Reel", Radiation Hardening=No, REACH SVHC="No SVHC", Series=GJM, Termination=SMD/SMT, Thickness=0.022inch, Voltage Rating=50V, Voltage Rating (DC)=50V, Width=0.5mm
C2 C15 C16 C17 C19 C25 C27 C29 C68 C69 C70 C71 C75: library part CMP-0001-00074-2, Capacitance=0.1uF, Manufacturer=Kemet, Part Number=C0402C104K4RACTU
C3 C6: library part CMP-2010-01684-2, Capacitance=10nF, Case Code (Imperial)=0201, Case Code (Metric)=0603, Dielectric=X7R, Max Operating Temperature=125°C, Min Operating Temperature=-55°C, Package Quantity=1, Tolerance=10%, Voltage=10V, Case/Package=0201, Depth=0.3mm, Height=0.3mm, Lead Free="Lead Free", Length=0.6mm, Material=Ceramic, Mount="Surface Mount", Packaging="Tape and Reel", Radiation Hardening=No, REACH SVHC="No SVHC", Termination=SMD/SMT, Thickness=0.013inch, Voltage Rating=10V, Voltage Rating (DC)=10V, Width=0.012inch
C4 C7 C9 C10 C38 C40 C41 C77: library part CMP-2008-04254-2, Capacitance=1nF, Case Code (Imperial)=0402, Case Code (Metric)=1005, Dielectric=C0G, Dielectric Material=Ceramic, Insulation Resistance=10GR, Max Operating Temperature=125°C, Min Operating Temperature=-55°C, Package Quantity=1, Temperature Coefficient=30ppm/°C, Tolerance=5%, Voltage=50V, Case/Package=0402, Depth=0.5mm, Height=0.5mm, Lead Free="Lead Free", Length=1mm, Material=Ceramic, Mount="Surface Mount", Number of Pins=2, Packaging="Tape and Reel", Radiation Hardening=No, REACH SVHC="No SVHC", Termination=SMD/SMT, Thickness=0.022inch, Voltage Rating=50V, Voltage Rating (DC)=50V, Width=0.5mm
C5: library part CMP-2008-02911-2, Capacitance=3.3nF, Case Code (Imperial)=0402, Case Code (Metric)=1005, Dielectric=X7R, Max Operating Temperature=125°C, Min Operating Temperature=-55°C, Package Quantity=1, Tolerance=5%, Voltage Rating=50V, Case/Package=0402, Construction=Flat, Contact Plating=Tin, Depth=0.5mm, Dissipation Factor=2.5%, Height=0.56mm, Lead Free="Lead Free", Length=1mm, Mount="Surface Mount", Number of Pins=2, Packaging="Tape and Reel", Radiation Hardening=No, REACH SVHC="No SVHC", RoHS Compliant=Yes, Series=-, Termination=SMD/SMT, Thickness=0.022inch, Voltage Rating (DC)=50V, Width=0.02inch
C8 C12 C13 C18 C24 C26 C28 C43 C44 C45 C72 C73 C74 C80: library part CMP-08246-004344-1, Capacitance=2.2uF, Case Code (Imperial)=0402, Case Code (Metric)=1005, Dielectric=X7S, Dielectric Material=Ceramic, Max Operating Temperature=125°C, Min Operating Temperature=-55°C, Package Quantity=1, Tolerance=10%, Voltage Rating=10V, Case/Package=0402, Depth=0.5mm, Height=0.5mm, Lead Free="Lead Free", Length=1mm, Mount="Surface Mount", Packaging="Tape and Reel", Resistor Type=Ceramic, RoHS Compliant=Yes, Series=C, Termination=SMD/SMT, Thickness=0.022inch, Voltage Rating (DC)=10V, Weight=2.3E-05oz, Width=0.02inch
C11 C23: library part CMP-2008-02567-2, Capacitance=100pF, Case Code (Imperial)=0402, Case Code (Metric)=1005, Dielectric=C0G, Dielectric Material=Ceramic, Max Operating Temperature=125°C, Min Operating Temperature=-55°C, Package Quantity=1, Tolerance=1%, Voltage=50V, Case/Package=0402, Depth=0.5mm, Height=0.56mm, Lead Free="Lead Free", Length=1mm, Mount="Surface Mount", Number of Pins=2, Packaging="Tape and Reel", Radiation Hardening=No, REACH SVHC="No SVHC", Termination=SMD/SMT, Thickness=0.022inch, Voltage Rating=50V, Voltage Rating (DC)=50V, Width=0.02inch
C14 C39 C42: library part CMP-00260-117335223-1, Capacitance=47µF, Case/Package=0603, Dielectric=X5R, Max Operating Temperature=85°C, Min Operating Temperature=-55°C, Tolerance=20%, Voltage Rating=6.3V, Height=1mm, Length=1.6mm, Lifecycle Status=Production, Material=Ceramic, NexarPartId=117335223, Thickness=800µm, Voltage Rating (DC)=6.3V, Width=800µm
C20 C21: library part CMP-2008-04245-1, Capacitance="10 pf 50V", Manufacturer=Murata, Part Number=GRM1555C1H100JA01D
C22 C30 C31 C32 C33 C34 C35 C56 C57 C58 C60 C61 C63 C78 C79: library part CMP-06035-000704-1, Capacitance="2.2 uF 50V", Case Code (Imperial)=0603, Case Code (Metric)=1608, Dielectric=X5R, Max Operating Temperature=85°C, Min Operating Temperature=-55°C, Package Quantity=4000, Resistor Type=Ceramic, Tolerance=20%, Voltage Rating=50V, Case/Package=0603, Height=0.8mm, Lead Free="Lead Free", Length=0.063inch, Mount="Surface Mount", Packaging="Tape and Reel", Termination=SMD/SMT, Thickness=0.039inch, Voltage Rating (DC)=50V, Weight=0.000222oz, Width=0.031inch
C36 C37: library part CMP-06035-054161-1, Capacitance="47 nf 50V", Case Code (Imperial)=0402, Case Code (Metric)=1005, Dielectric=X7R, Max Operating Temperature=125°C, Min Operating Temperature=-55°C, Package Quantity=10000, Resistor Type=Ceramic, Tolerance=20%, Voltage Rating=50V, Case/Package=0402, Height=0.5mm, Length=0.039inch, Mount="Surface Mount", Packaging="Tape and Reel", Termination=SMD/SMT, Thickness=0.022inch, Voltage Rating (DC)=50V, Weight=0.000212oz, Width=0.5mm
C46 C47 C48 C76: library part CMP-0001-00074-2, Capacitance="0.1 uF", Manufacturer=Kemet, Part Number=C0402C104K4RACTU
C49 C50 C52 C53 C54 C55: library part CMP-2008-03799-2, "Multi-Layer Ceramic Capacitor 12pF C0G  ±2% 0402 Paper T/R", Capacitance=12pF, Case Code (Imperial)=0402, Case Code (Metric)=1005, Dielectric=C0G, Max Operating Temperature=125°C, Min Operating Temperature=-55°C, Package Quantity=10000, Tolerance=2%, Voltage Rating=50V, Case/Package=0402, Depth=0.5mm, Height=0.5mm, Lead Free="Lead Free", Length=1mm, Mount="Surface Mount", Packaging="Tape and Reel", Radiation Hardening=No, Termination=SMD/SMT, Thickness=0.022inch, Voltage Rating (DC)=50V, Width=0.5mm
C51: library part CMP-2008-04254-2, "Chip Multilayer Ceramic Capacitors for General Purpose, 0402, 1000pF, C0G, 30ppm/°C, 5%, 50V", Capacitance=1nF, Case Code (Imperial)=0402, Case Code (Metric)=1005, Dielectric=C0G, Dielectric Material=Ceramic, Insulation Resistance=10GR, Max Operating Temperature=125°C, Min Operating Temperature=-55°C, Package Quantity=1, Temperature Coefficient=30ppm/°C, Tolerance=5%, Voltage=50V, Case/Package=0402, Depth=0.5mm, Height=0.5mm, Lead Free="Lead Free", Length=1mm, Material=Ceramic, Mount="Surface Mount", Number of Pins=2, Packaging="Tape and Reel", Radiation Hardening=No, REACH SVHC="No SVHC", Termination=SMD/SMT, Thickness=0.022inch, Voltage Rating=50V, Voltage Rating (DC)=50V, Width=0.5mm
C59: library part CMP-2007-03354-2, Capacitance="1 uF 50V", Case Code (Imperial)=0805, Case Code (Metric)=2012, Dielectric=X7R, Max Operating Temperature=125°C, Min Operating Temperature=-55°C, Package Quantity=3000, Ratings=AEC-Q200, Tolerance=10%, Voltage Rating=50V, Case/Package=0805, Depth=1.2mm, Height=1.25mm, Lead Free="Lead Free", Length=2mm, Mount="Surface Mount", Packaging="Tape and Reel", Radiation Hardening=No, Termination=SMD/SMT, Thickness=0.055inch, Voltage Rating (DC)=50V, Weight=0.000335oz, Width=0.049inch
C62: library part CMP-06035-019038-1, Capacitance="0.1 uF 50V", Dielectric=X7S, Tolerance=10%, Voltage Rating (DC)=50V, Length=1mm, Thickness=500um, Width=500um
C64 C65 C66 C67: library part CMP-06035-028020-1, Cap="1 uF 10V"
D1: library part CMP-12791-000024-1, "DIODE ARRAY GP 85V 75MA SOT523", Capacitance=1.5pF, Forward Current=75mA, Manufacturer="Diodes Inc.", Max Junction Temp=+150°C, Max Repetitive Reverse Voltage=85V, Max Surge Forward Current=0.5A, Package=SOT523, Peak Reverse Current=2uA, Temperature="-65°C to +150°C", Temperature Range Low=-65°C, Automotive=No, Category=Diode, ComponentLink2Description=Datasheet, ComponentLink2URL=https://www.diodes.com/assets/Datasheets/ds30260.pdf, Device Class L1="Discrete Semiconductors", Device Class L2=Diodes, Device Class L3="Rectifier Diodes", Digikey Description="DIODE ARRAY GP 85V 75MA SOT523", Footprint Url=https://www.diodes.com/assets/Package-Files/SOT523.pdf, Height=0.9mm, Lead Free=Yes, Manufacturer Part Number=BAV99T-7-F, Mouser Description="BAV99T Series 4 A 85 V 150 mW Surface Mount Fast Switching Diode - SOT-523", Octopart=https://octopart.com/bav99t-7-f-diodes+inc.-326340, Reverse Voltage=85V, RoHS=TRUE, Standoff Height=0mm, Temperature Range High=+150°C
D2: library part CMP-44529-000045-1, "LED GREEN CLEAR 1608 SMD", Case Code (Imperial)=0603, Case Code (Metric)=1608, Color=Green, Forward Voltage=2.65V, Lens Color=Colorless, Test Current=2mA, Case/Package=0603, Dominant Wavelength=525nm, Height=0.75mm, Length=1.6mm, Lens Size=0.7mm, Lens Style=Round, Lens Transparency=Clear, Luminous Intensity=180mcd, Mount="Surface Mount", Packaging="Tape and Reel", Viewing Angle=100°, Width=0.8mm
D3: "Diode Schottky 40V 1A Automotive 2-Pin SOD-323 T/R", Average Rectified Current=1A, Manufacturer=Diodes, Max Reverse Voltage (DC)=40V, Supplier Part Number 1=3127490, Category="Rectifier Diodes", ComponentLink1Description=http://www.mouser.com/ds/2/115/ZHCS400Q-959646.pdf?src-supplier=Mouser, ComponentLink1URL=http://www.mouser.com/ds/2/115/ZHCS400Q-959646.pdf?src-supplier=Mouser, Manufacturer Part Number=ZHCS400QTA, Mount="Surface Mount", Packaging="Tape and Reel", Pricing 1="5=0.87300, 10=0.73400, 100=0.49400, 500=0.38800 (CHF)", RoHS=Yes, RoHS Compliant=Yes, Stock 1=385, Supplier 1=Farnell
FB1 FB2: library part CMP-00260-111572291-1, "BLM18SP101SN1D Ferrite Bead, 100 Ohm, 3.7A, 0603 Rohs Compliant: Yes", Case/Package=0603, Max Operating Temperature=125°C, Min Operating Temperature=-55°C, Resistance=22mΩ, RMS Current (Irms)=3.7A, Test Frequency=100MHz, Tolerance=25%, Core Material=Ferrite, Height=950µm, Lifecycle Status=Production, NexarPartId=111572291, Series Resistance=22mΩ
FB3 FB4: library part CMP-00260-111572290-1, "BLM18SP101SH1D Ferrite Beads Multi-Layer 100Ohm 25% 100MHz 3.7A 0.022Ohm DCR 0603 Automotive T/R", Case/Package=0603, Max Operating Temperature=125°C, Min Operating Temperature=-55°C, Resistance=22mΩ, RMS Current (Irms)=3.7A, Test Frequency=100MHz, Tolerance=25%, Core Material=Ferrite, Height=950µm, Lifecycle Status=Production, NexarPartId=111572290, Schedule B="8504500000, 8504500000", Series Resistance=22mΩ
J1 J2: library part CMP-11605-000009-1, "CONN RCPT 40POS SMD GOLD", Current Rating=0.3A, Manufacturer=Hirose, Package=0, Temperature="-35°C to +85°C", Temperature Range High=+85°C, Temperature Range Low=-35°C, Voltage Rating=30V, Automotive=No, Category=Conn, ComponentLink2Description=Datasheet, ComponentLink2URL=https://www.hirose.com/product/document?clcode=CL0684-4008-7-51&productname=DF40C-40DS-0.4V(51)&series=DF40&documenttype=SpecSheet&lang=en&documentid=0000427780, Conn Gender=Female, Conn Orientation=Vertical, Contact Material=Gold,Nickel, Device Class L1=Connectors, Device Class L2="Board to Board Connectors", Device Class L3=unset, Digikey Description="CONN RCPT 40POS SMD GOLD", Footprint Url=https://www.hirose.com/product/document?clcode=CL0684-4008-7-51&productname=DF40C-40DS-0.4V(51)&series=DF40&documenttype=2DDrawing&lang=en&documentid=0001001229, Height=1.65mm, Is Female=yes, Lead Free=Yes, Manufacturer Part Number=DF40C-40DS-0.4V(51), Number of Contacts=40, Number of Rows=2, Octopart=https://octopart.com/df40c-40ds-0.4v%2851%29-hirose-19073526, Pitch=0.4mm, RoHS=TRUE, Standoff Height=0mm
J4 J6: "No Description Available", Mfr_Name=Hirose, Copyright="Copyright (C) 2022 Ultra Librarian. All rights reserved.", Manufacturer_Part_Number=DF52-16S-0.8H(21), RefDes=RefDes, Type=DEV
J7 J8 J9 J13 J14: library part CMP-00467-6, "Solder Jumper 3 Pads", Technology=SMT
J10 J11 J15: library part CMP-2000-05152-3, "CONN U.FL RCPT STR 50 OHM SMD", Dielectric Material=Polymer, Frequency=6GHz, Housing Color=Beige, Insulation Resistance=500MR, Max Operating Temperature=90°C, Min Operating Temperature=-40°C, Package Quantity=2500, Body Material=Bronze, Body Plating=Silver, Connector Type=Coaxial, Contact Material=Brass, Contact Plating=Gold, Depth=3.1mm, Fastening Type=Snap, Gender=Male, Impedance=50R, Lead Free="Lead Free", Length=3mm, Max Frequency=6GHz, Mount="Surface Mount", Orientation=Straight, Packaging="Cut Tape", Radiation Hardening=No, REACH SVHC="No SVHC", Series=U.FL, Termination=Solder, Weight=0.001764oz, Wire/Cable Type=Coaxial
J12: "50 Position 0.4mm Pitch Dual Row Vertical Surface Mount (SMT) Pin Socket, 3.0mm Stacking Height", Mfr_Name=Hirose, Copyright="Copyright (C) 2023 Ultra Librarian. All rights reserved.", Manufacturer_Part_Number=DF40HC(3.0)-50DS-0.4V(51), RefDes=RefDes, Type=DEV
L1 L2: library part CMP-0220-00032-1, "SMD EMI Suppression Ferrite Bead WE-CBF, Z = 600 Ohm", ComponentLink1Description="Manufacturer Link", ComponentLink1URL=http://www.we-online.com, ComponentLink2Description=Datasheet, ComponentLink2URL=http://www.we-online.de/katalog/media/pdf/742792040.pdf, DatasheetVersion=Dec-2005, Impedance="600 Ohm", PackageDescription="Chip Inductor, 2-Leads, Body 2.0 x 1.2 mm", PackageReference=SMD-0805, PackageVersion=2005
L3 L4: library part CMP-06042-007129-1, "Wire Wound Ferrite Inductor for Power Lines For Automotive 10μH ±20% 0.228Ω 1280mA 1212", Case Code (Imperial)=1212, Case Code (Metric)=3030, Current Rating=1.28A, DC Resistance (DCR)=228mR, Inductance=10uH, Max Operating Temperature=85°C, Min Operating Temperature=-40°C, Ratings=AEC-Q200, Resistor Type=Wirewound, Saturation Current=810mA, Self Resonant Frequency=20MHz, Test Frequency=1MHz, Tolerance=20%, Case/Package=1212, Core Material=Ferrite, Mount="Surface Mount", Packaging="Cut Tape", Shielding=Shielded
Q1: "MOSFET (N-Channel)", Manufacturer_Name=Nexperia, Mouser Part Number=771-NX7002BKMBYL, Arrow Part Number=NX7002BKMBYL, Arrow Price/Stock=https://www.arrow.com/en/products/nx7002bkmbyl/nexperia?region=nac, Datasheet Link=https://assets.nexperia.com/documents/data-sheet/NX7002BKMB.pdf, Height=0.4mm, Manufacturer_Part_Number=NX7002BKMBYL, Mouser Price/Stock=https://www.mouser.co.uk/ProductDetail/Nexperia/NX7002BKMBYL?qs=%252BRKXB2WKlSdBDdfwQeVqTQ%3D%3D
R1: library part CMP-1011-00077-3, Case Code (Imperial)=0402, Case Code (Metric)=1005, Max Operating Temperature=155°C, Max Power Dissipation=63mW, Min Operating Temperature=-55°C, Package Quantity=1, Resistance=1.3kR, Temperature Coefficient=200ppm/°C, Tolerance=5%, Voltage Rating=50V, Case/Package=0402, Composition="Thick Film", Contact Plating=Tin, Depth=0.5mm, Features="Automotive AEC-Q200", Height=0.016inch, Lead Free="Lead Free", Length=1mm, Military Standard=Not, Number of Terminations=2, Packaging="Tape and Reel", Power Rating=63mW, Radiation Hardening=No, Voltage Rating (DC)=50V, Weight=2.3E-05oz, Width=0.5mm
R2 R3: library part CMP-2002-00758-4, Case Code (Imperial)=0402, Case Code (Metric)=1005, Max Operating Temperature=155°C, Max Power Dissipation=100mW, Min Operating Temperature=-55°C, Package Quantity=10000, Resistance=2kR, Resistance Tolerance=1%, Resistor Type="Thick Film", Temperature Coefficient=100ppm/°C, Voltage Rating=50V, Case/Package=0402, Construction=Rectangular, Contact Plating=Tin, Depth=0.5mm, Features="Automotive AEC-Q200", Height=0.35mm, Lead Free="Lead Free", Length=1mm, Military Standard=Not, Mount="Surface Mount", Number of Terminations=2, Packaging="Tape and Reel", Power Rating=100mW, Radiation Hardening=No, REACH SVHC="No SVHC", RoHS Compliant=Yes, Series=ERJ, Technology="THICK FILM", Termination=SMD/SMT, Tolerance=1%, Voltage Rating (DC)=50V, Width=0.02inch, Working Voltage=50V
R4: library part CMP-00030-23798141-1, Case/Package=0402, Max Operating Temperature=155°C, Min Operating Temperature=-55°C, Power Rating=63mW, Resistance=1Ω, Temperature Coefficient=100ppm/°C, Tolerance=1%, Voltage Rating=50V, Composition="Thick Film", Height=350µm, Lead Free="Lead Free", NexarPartId=23798141, RoHS=Compliant, Schedule B="8533210045, 8533210045"
R5: library part CMP-02407-008611-1, Case/Package=0402, Max Operating Temperature=125°C, Max Power Dissipation=100mW, Min Operating Temperature=-55°C, Package Quantity=10000, Resistance=2.7kR, Temperature Coefficient=50ppm/°C, Tolerance=1%, Composition="Thin Film", Contact Plating=Tin, Depth=0.5mm, Height=0.015inch, Lead Free="Lead Free", Length=0.039inch, Military Standard=Not, Number of Terminations=2, Packaging="Tape and Reel", Radiation Hardening=No, Width=0.02inch
R6 R7 R8 R17 R18 R19 R20 R25 R30 R46: library part CMP-2002-08122-2, Case Code (Imperial)=0402, Case Code (Metric)=1005, Max Operating Temperature=155°C, Max Power Dissipation=63mW, Min Operating Temperature=-55°C, Package Quantity=1, Resistance=0mR, Temperature Coefficient=100ppm/°C, Tolerance=5%, Voltage Rating=50V, Case/Package=0402, Composition="Thick Film", Contact Plating=Tin, Depth=0.5mm, Features="Automotive AEC-Q200", Height=0.35mm, Lead Free="Lead Free", Length=1mm, Military Standard=Not, Mount="Surface Mount", Number of Terminations=2, Packaging="Tape and Reel", Power Rating=63mW, Radiation Hardening=No, Termination=SMD/SMT, Voltage Rating (DC)=50V, Weight=2.3E-05oz, Width=0.5mm
R9: library part CMP-26527-004787-1, Case Code (Imperial)=0201, Case Code (Metric)=0603, Max Operating Temperature=125°C, Max Power Dissipation=50mW, Min Operating Temperature=-55°C, Package Quantity=10000, Resistance=47kR, Resistor Type="Thick Film", Temperature Coefficient=200ppm/°C, Tolerance=5%, Case/Package=0201, Contact Plating=Tin, Height=0.009inch, Length=0.024inch, Mount="Surface Mount", Number of Terminations=2, Packaging="Tape and Reel", Power Rating=50mW, Radiation Hardening=No, RoHS Compliant=Yes, Series=RMCF, Width=0.012inch
R10 R11 R12 R14 R16 R22 R43 R44: library part CMP-2002-08136-3, Case Code (Imperial)=0402, Case Code (Metric)=1005, Max Operating Temperature=155°C, Max Power Dissipation=63mW, Min Operating Temperature=-55°C, Package Quantity=1, Resistance=10kR, Temperature Coefficient=200ppm/°C, Tolerance=5%, Voltage Rating=50V, Case/Package=0402, Composition="Thick Film", Contact Plating=Tin, Depth=0.5mm, Features="Automotive AEC-Q200", Height=0.016inch, Length=1mm, Military Standard=Not, Mount="Surface Mount", Number of Terminations=2, Packaging="Tape and Reel", Power Rating=63mW, Radiation Hardening=No, Termination=SMD/SMT, Weight=2.3E-05oz, Width=0.5mm
R13: library part CMP-2002-00083-2, Case Code (Imperial)=0402, Case Code (Metric)=1005, Max Operating Temperature=155°C, Max Power Dissipation=63mW, Min Operating Temperature=-55°C, Package Quantity=1, Resistance=51R, Temperature Coefficient=200ppm/°C, Tolerance=5%, Voltage Rating=50V, Case/Package=0402, Composition="Thick Film", Contact Plating=Tin, Depth=0.5mm, Features="Automotive AEC-Q200", Height=0.35mm, Lead Free="Lead Free", Length=1mm, Military Standard=Not, Mount="Surface Mount", Number of Pins=2, Number of Terminations=2, Packaging="Tape and Reel", Power Rating=63mW, Radiation Hardening=No, Termination=SMD/SMT, Voltage Rating (DC)=50V, Weight=2.3E-05oz, Width=0.5mm